# Altium PCB uTCA_MCH_PCB3.pcbdoc (part 1 of 8)
Units mm, origin at the board's own origin, x right, y up, seen from the top; angles counter-clockwise.
Board outline 182.75 x 75.8 mm, 10 copper layers (Top Layer, GND1, MidLayer1, PWR1, Mid-Layer 2, GND2, PWR2, Mid-Layer 3, GND3, Bottom Layer), stack 1.568 mm thick; 778 components, 977 nets, 4756 pads, 1214 vias.
Unrouted connection lines stored in the file: 1790.
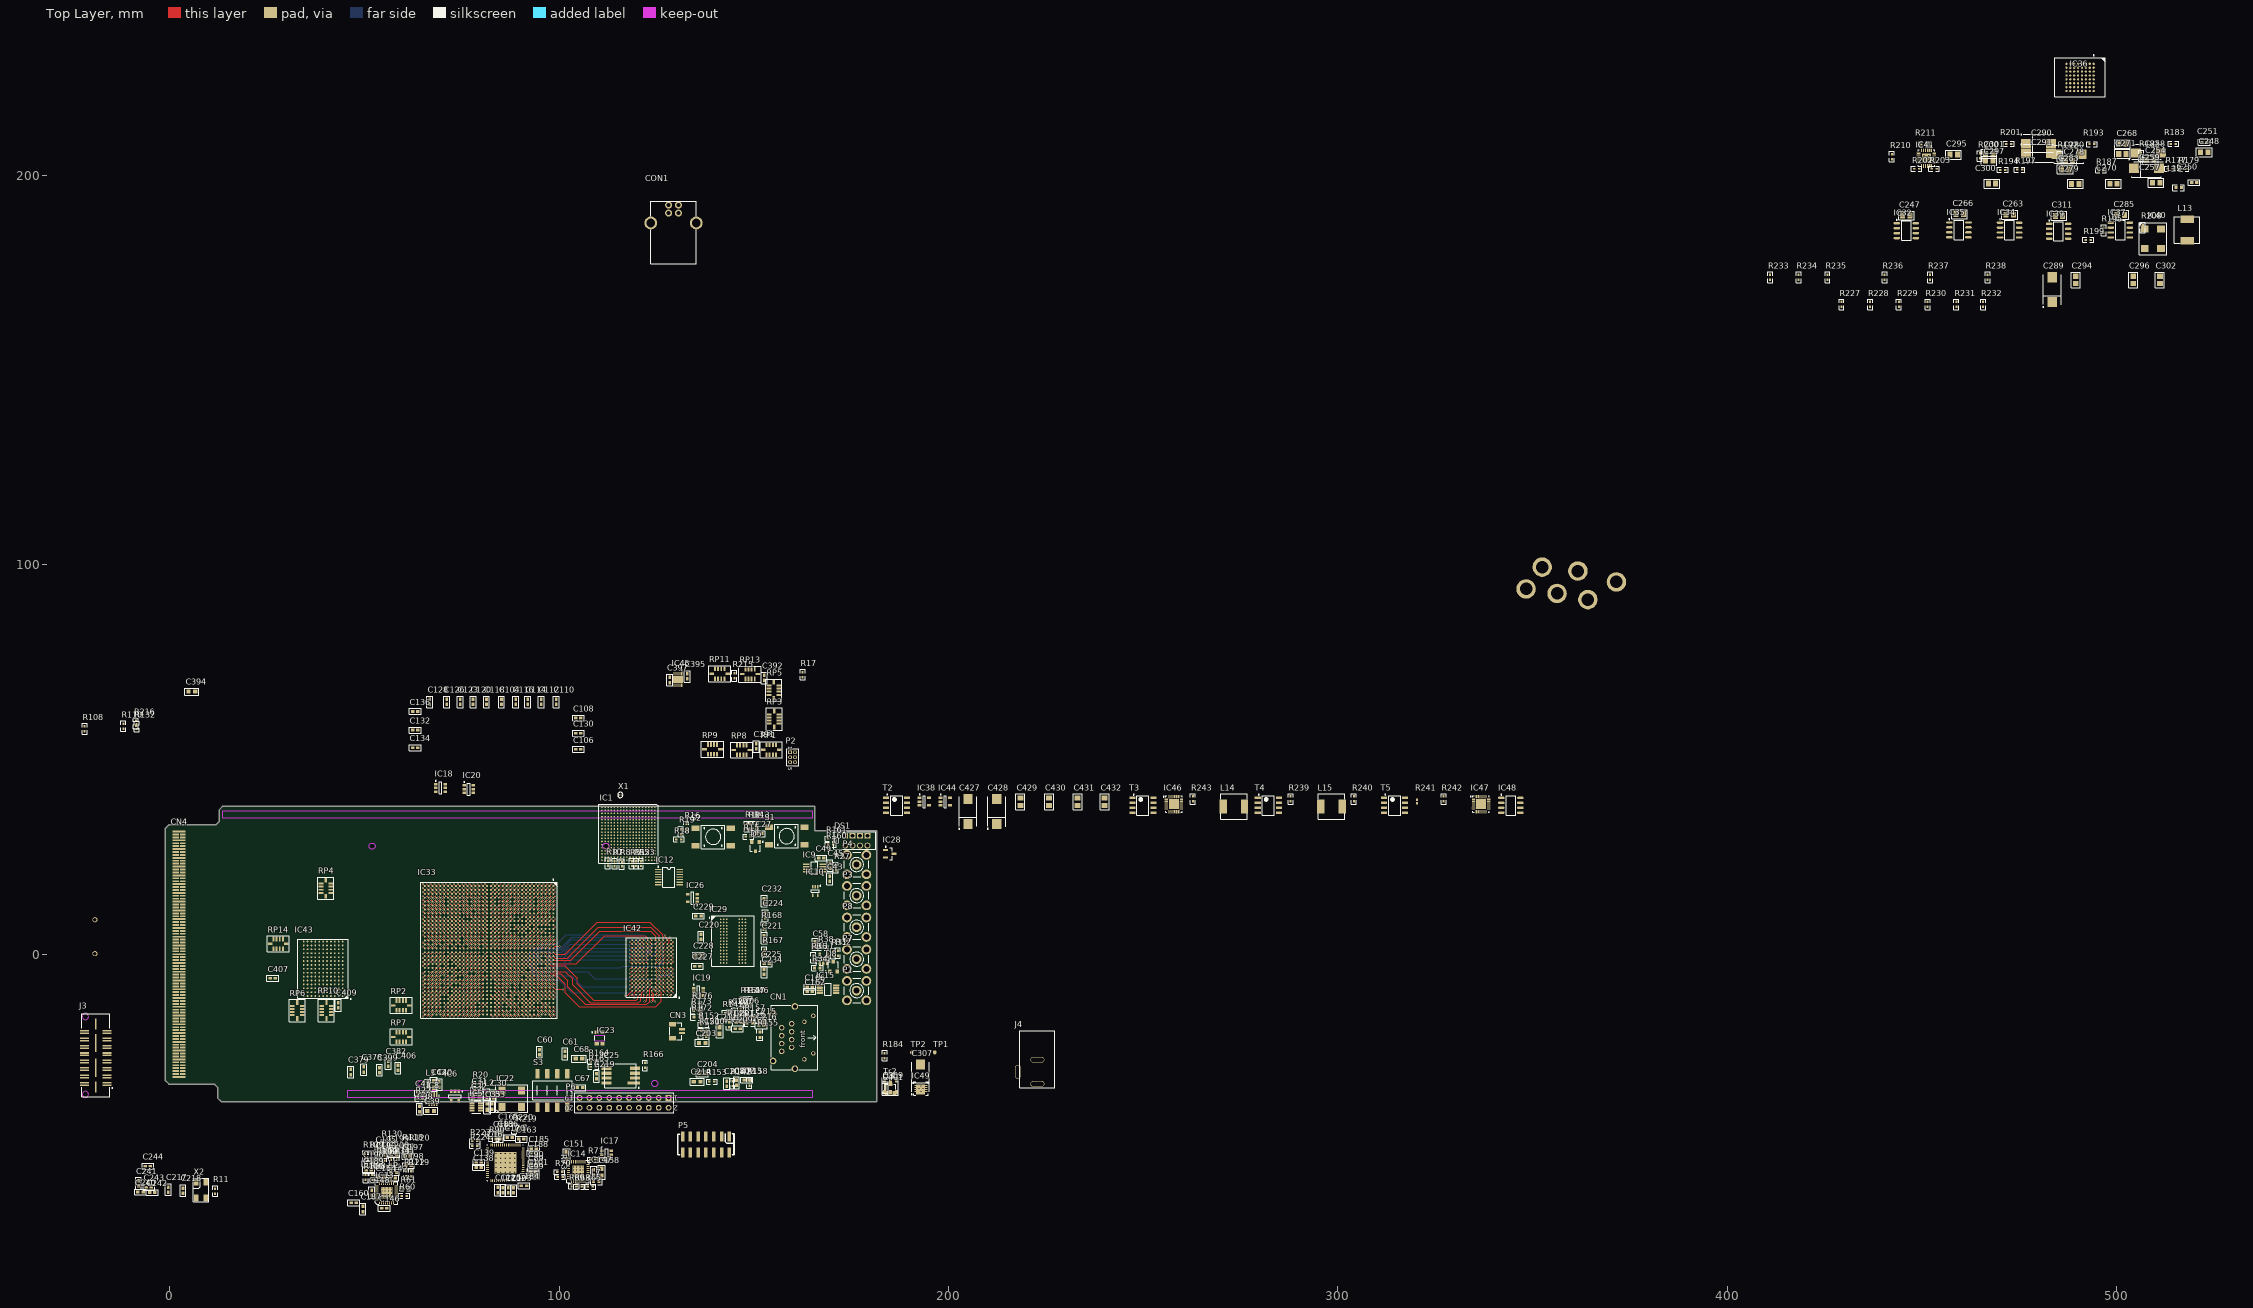
[diagram p0: Top Layer view]
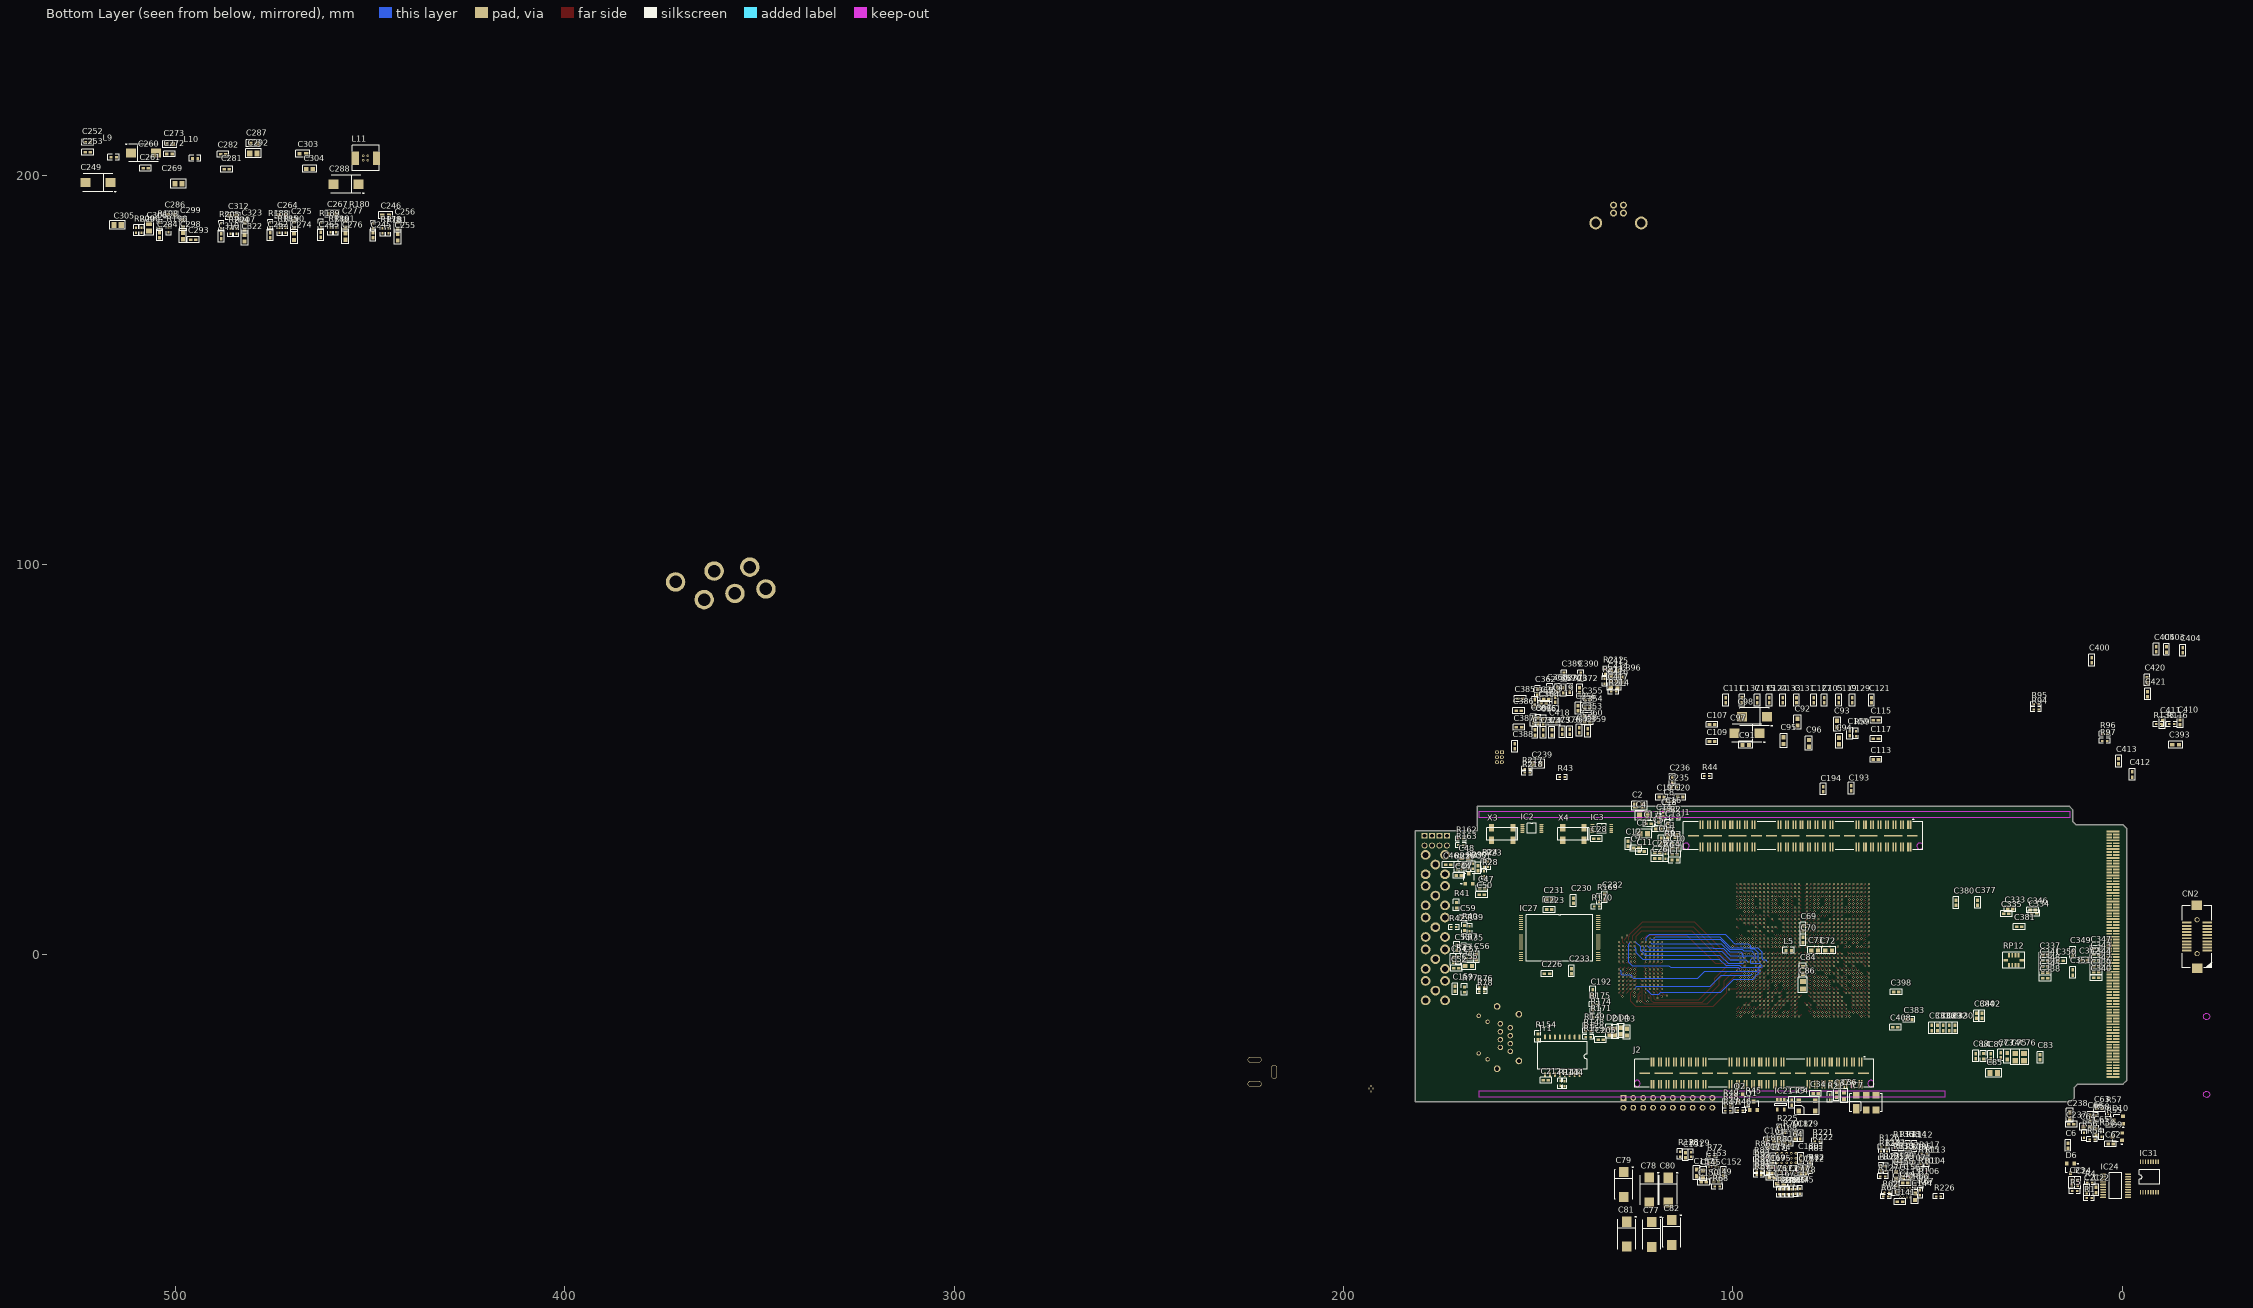
[diagram p1: Bottom Layer view, seen from below]
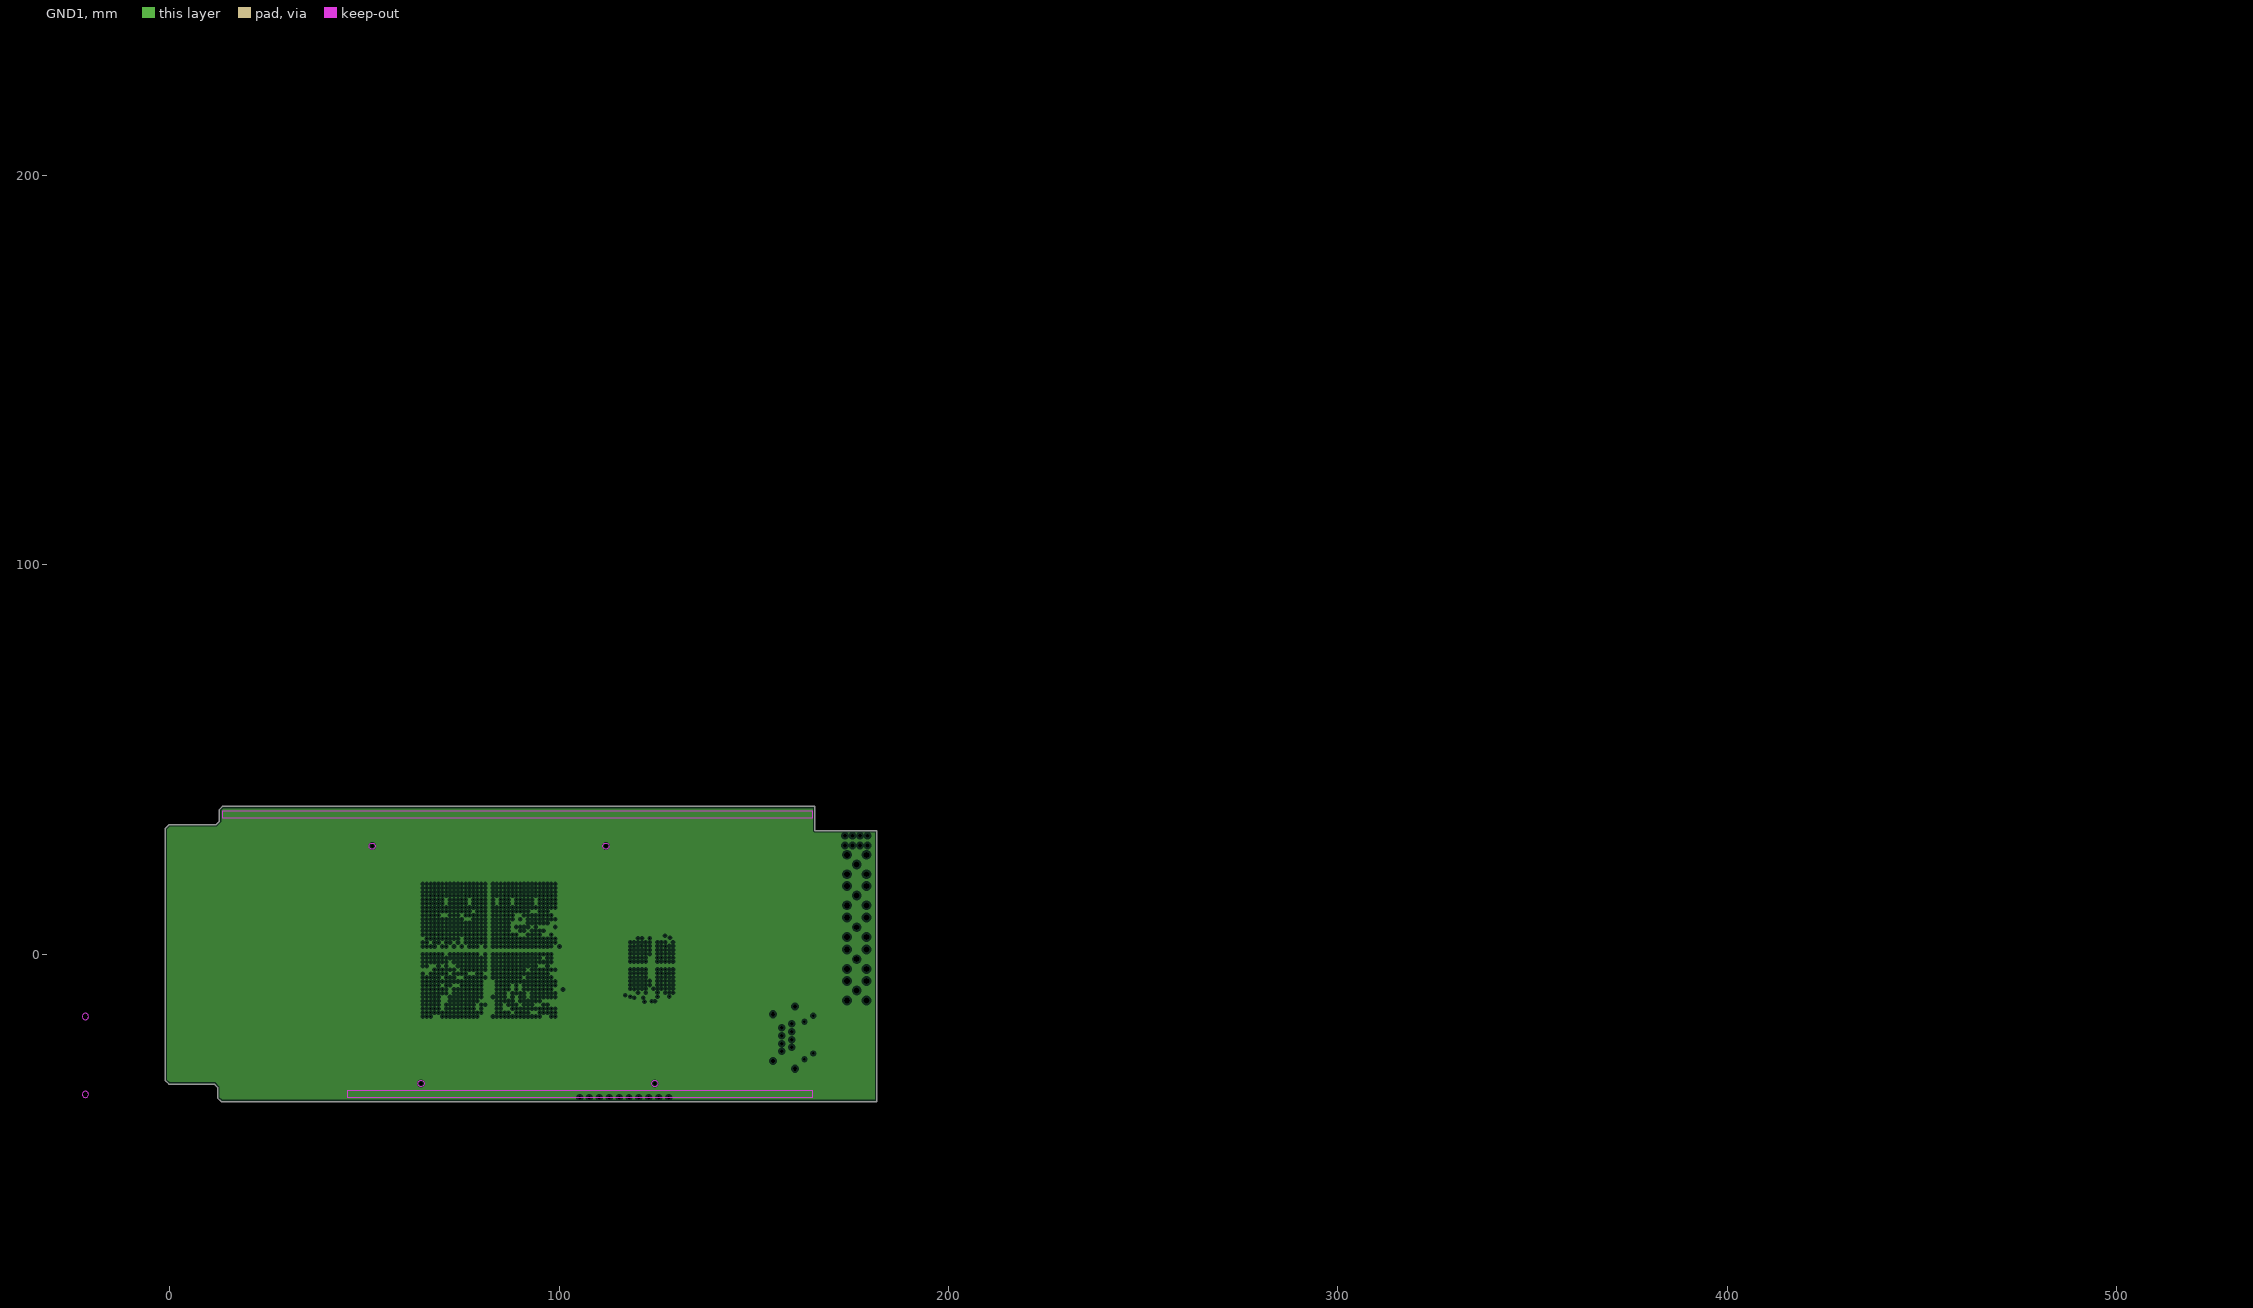
[diagram p2: GND1, clearances drawn from the general rule]
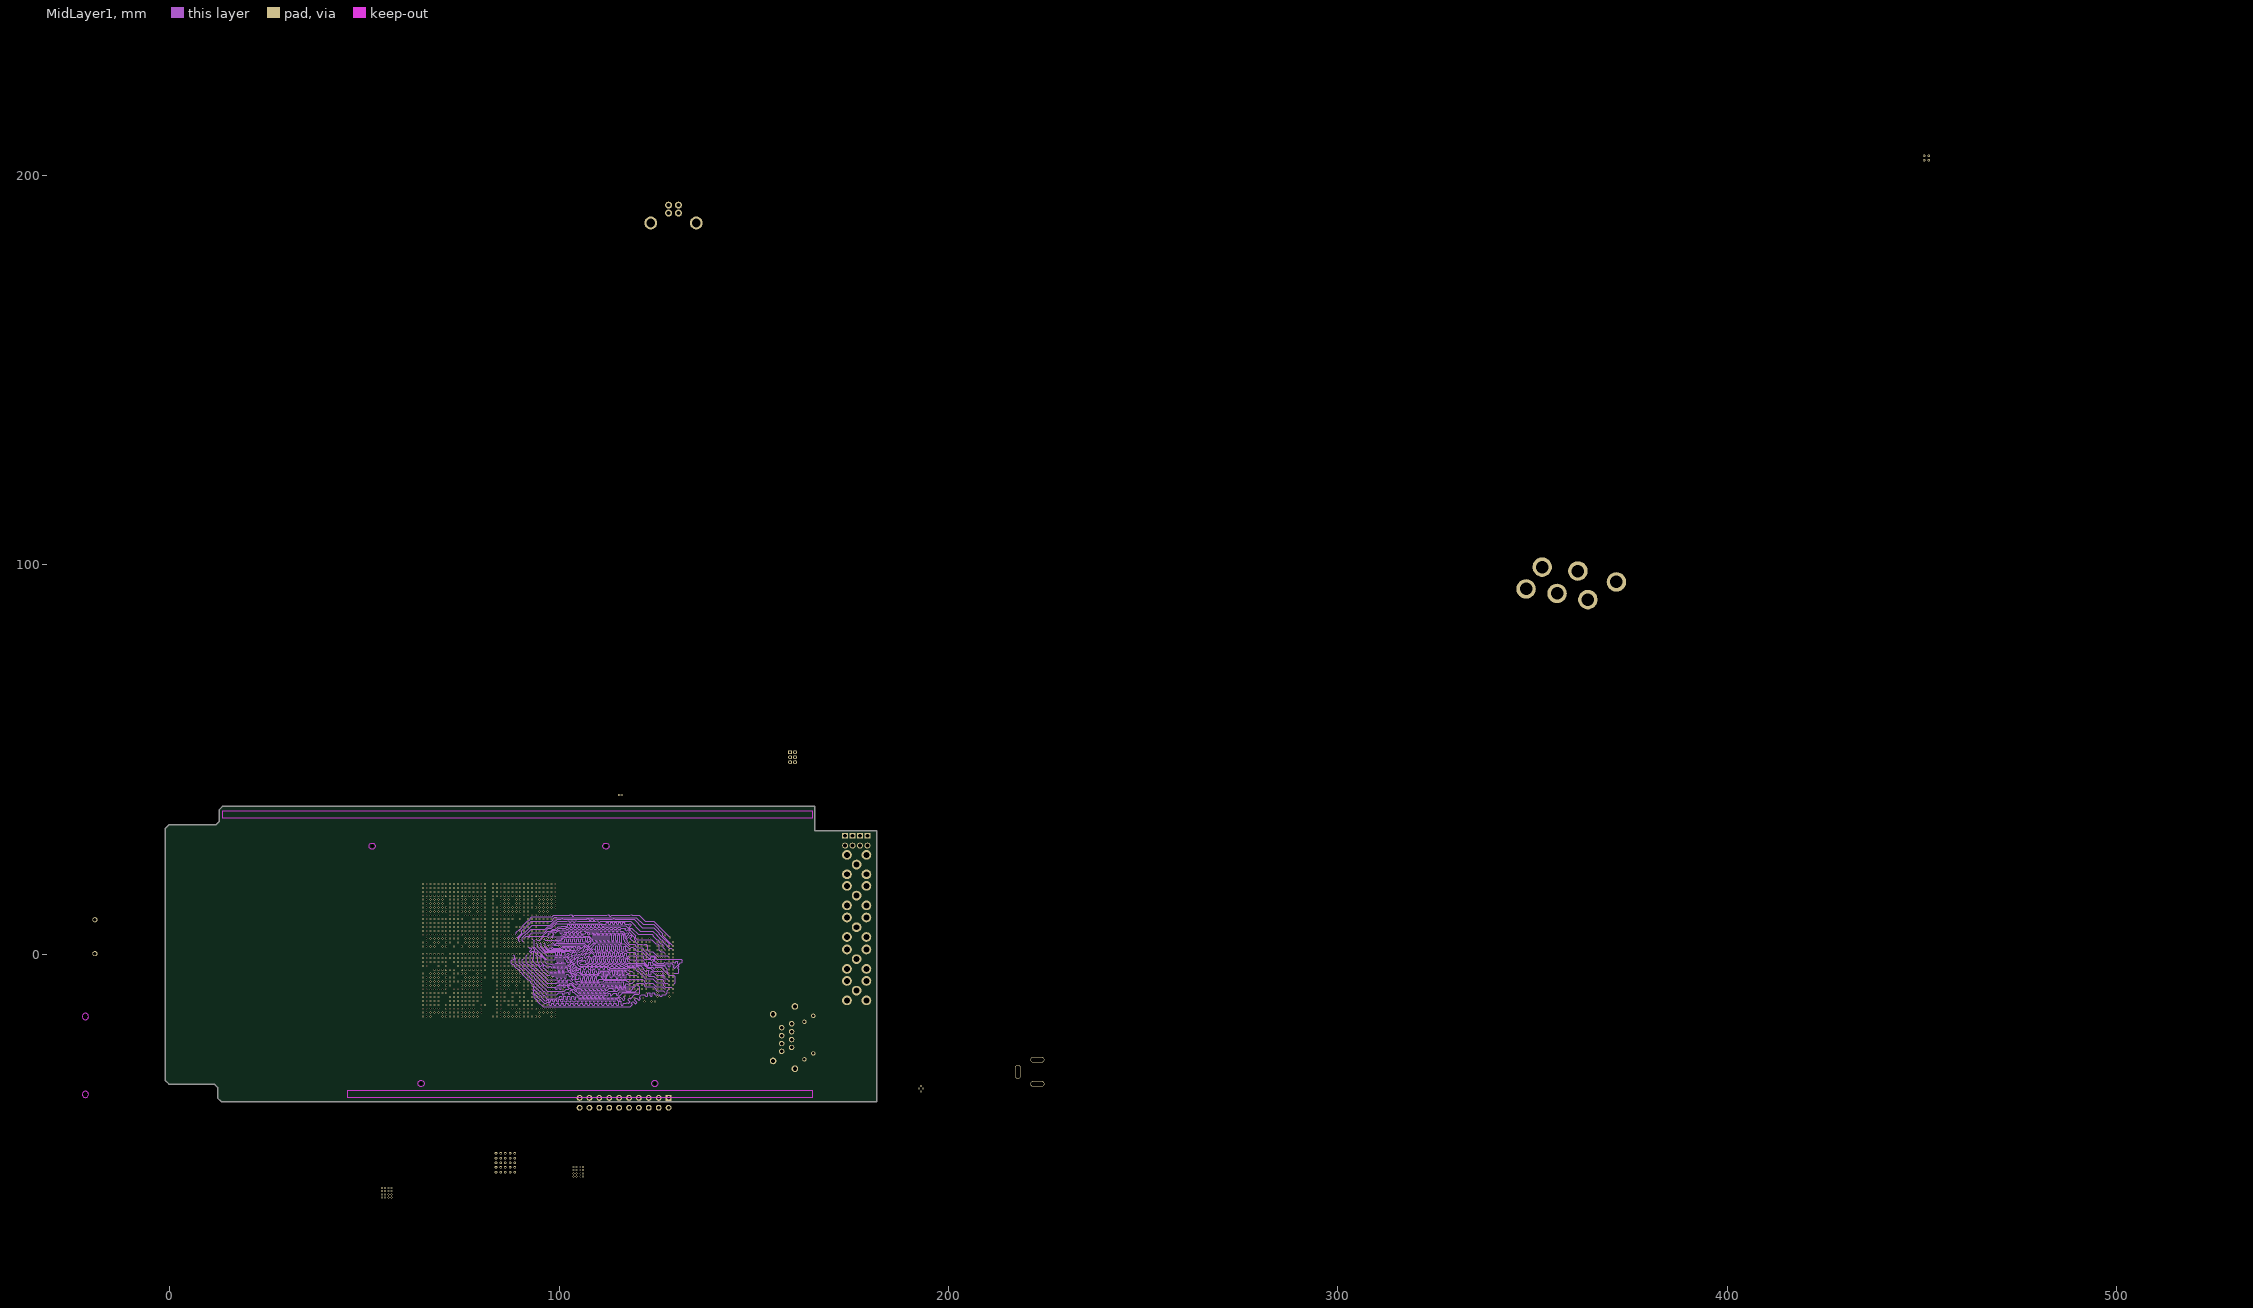
[diagram p3: MidLayer1]
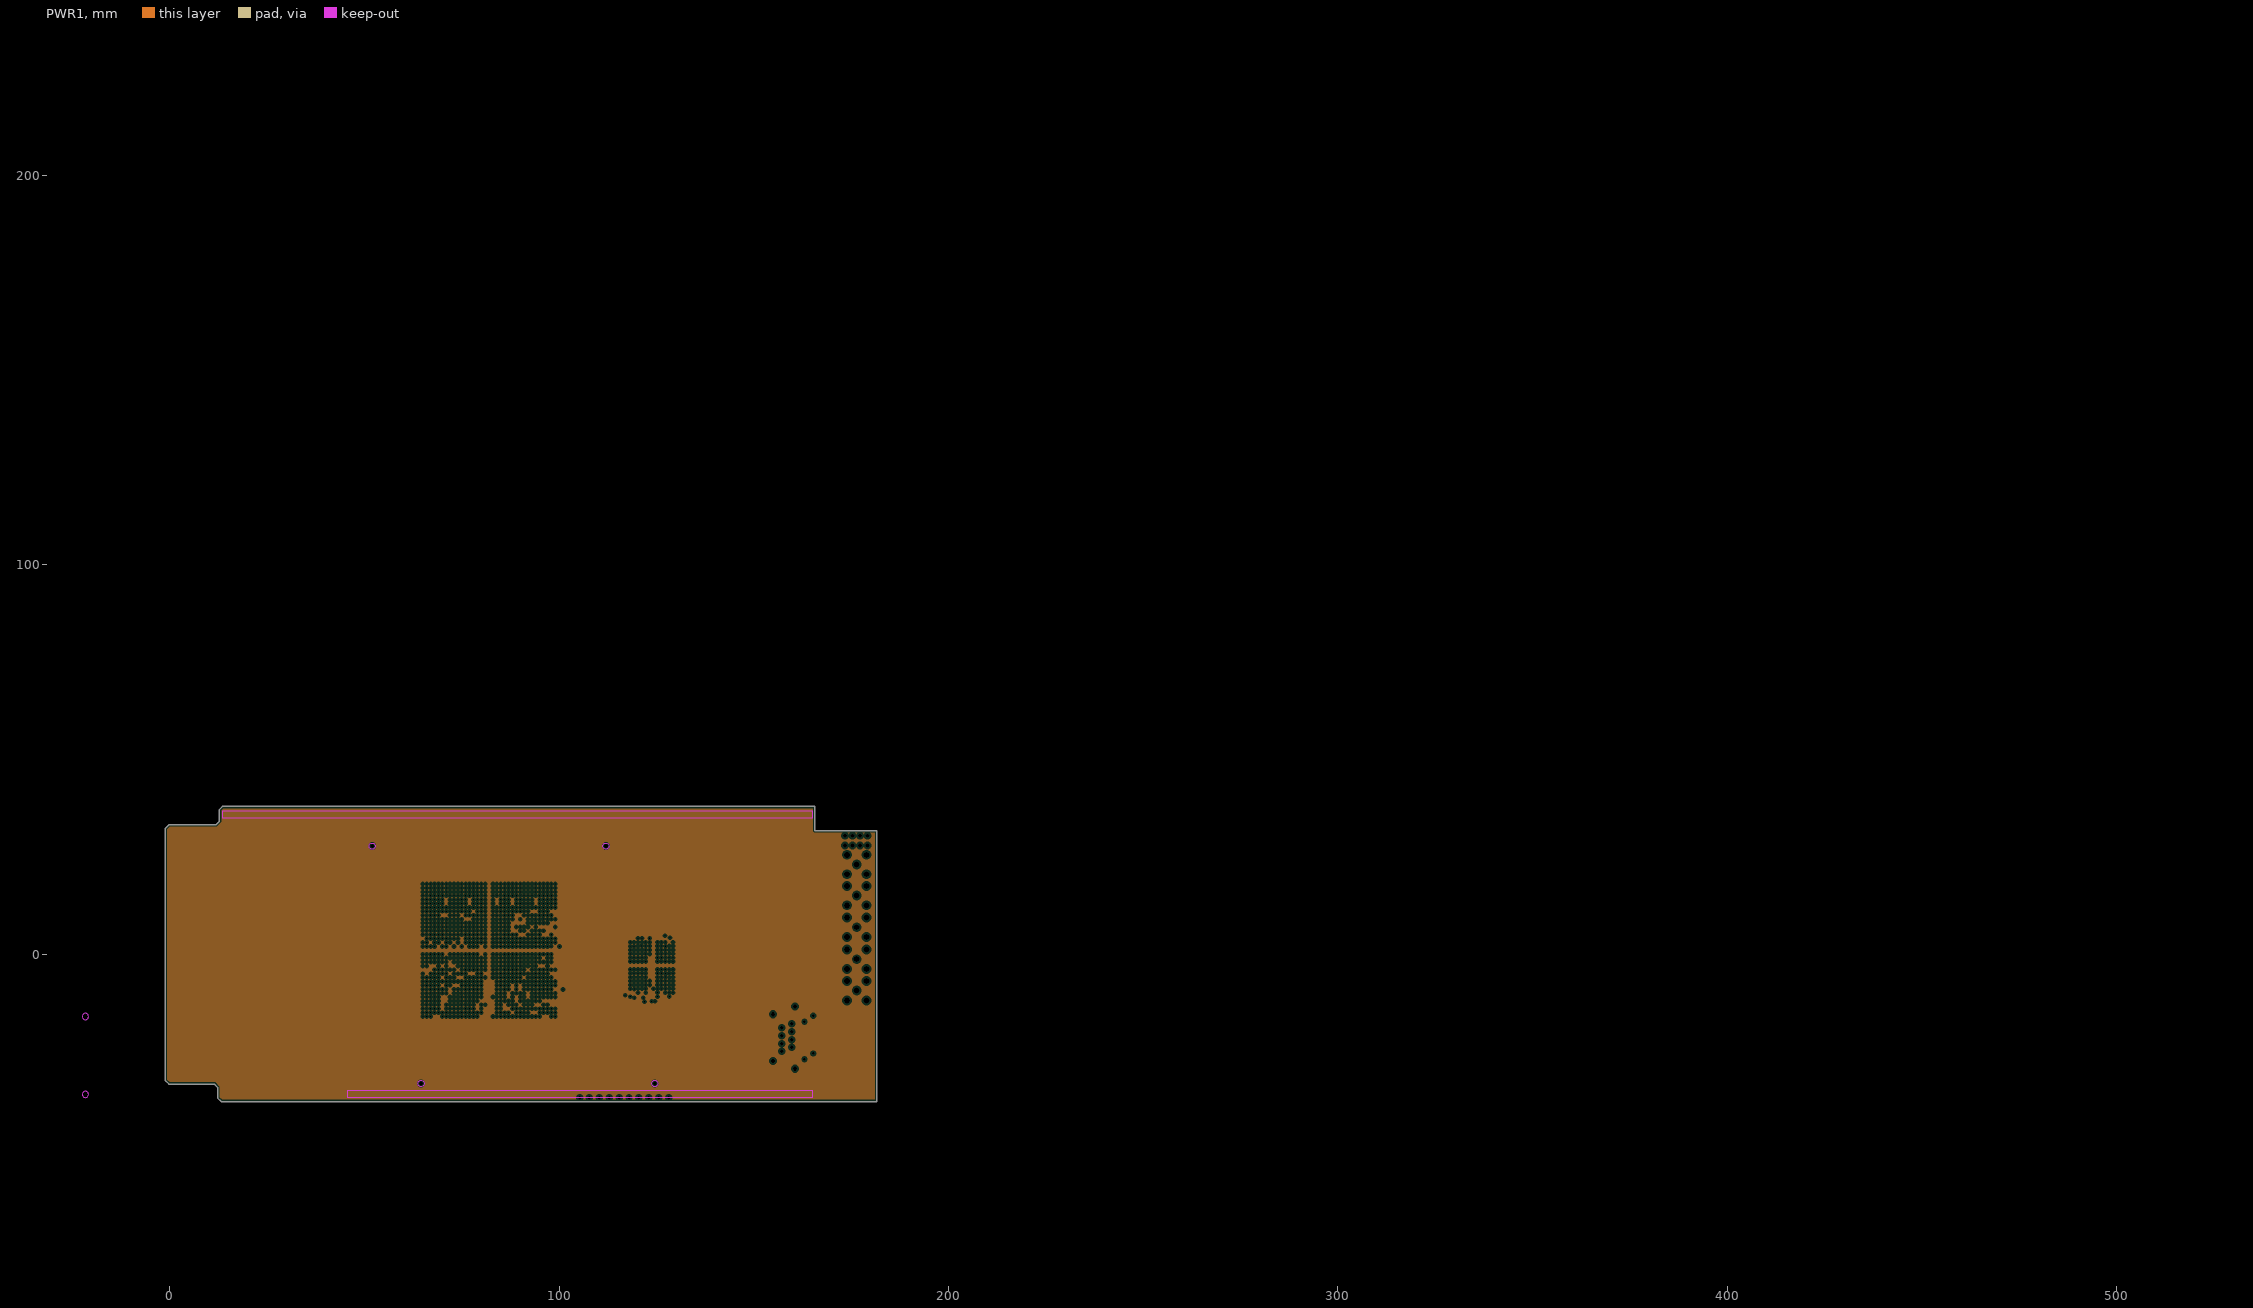
[diagram p4: PWR1, clearances drawn from the general rule]
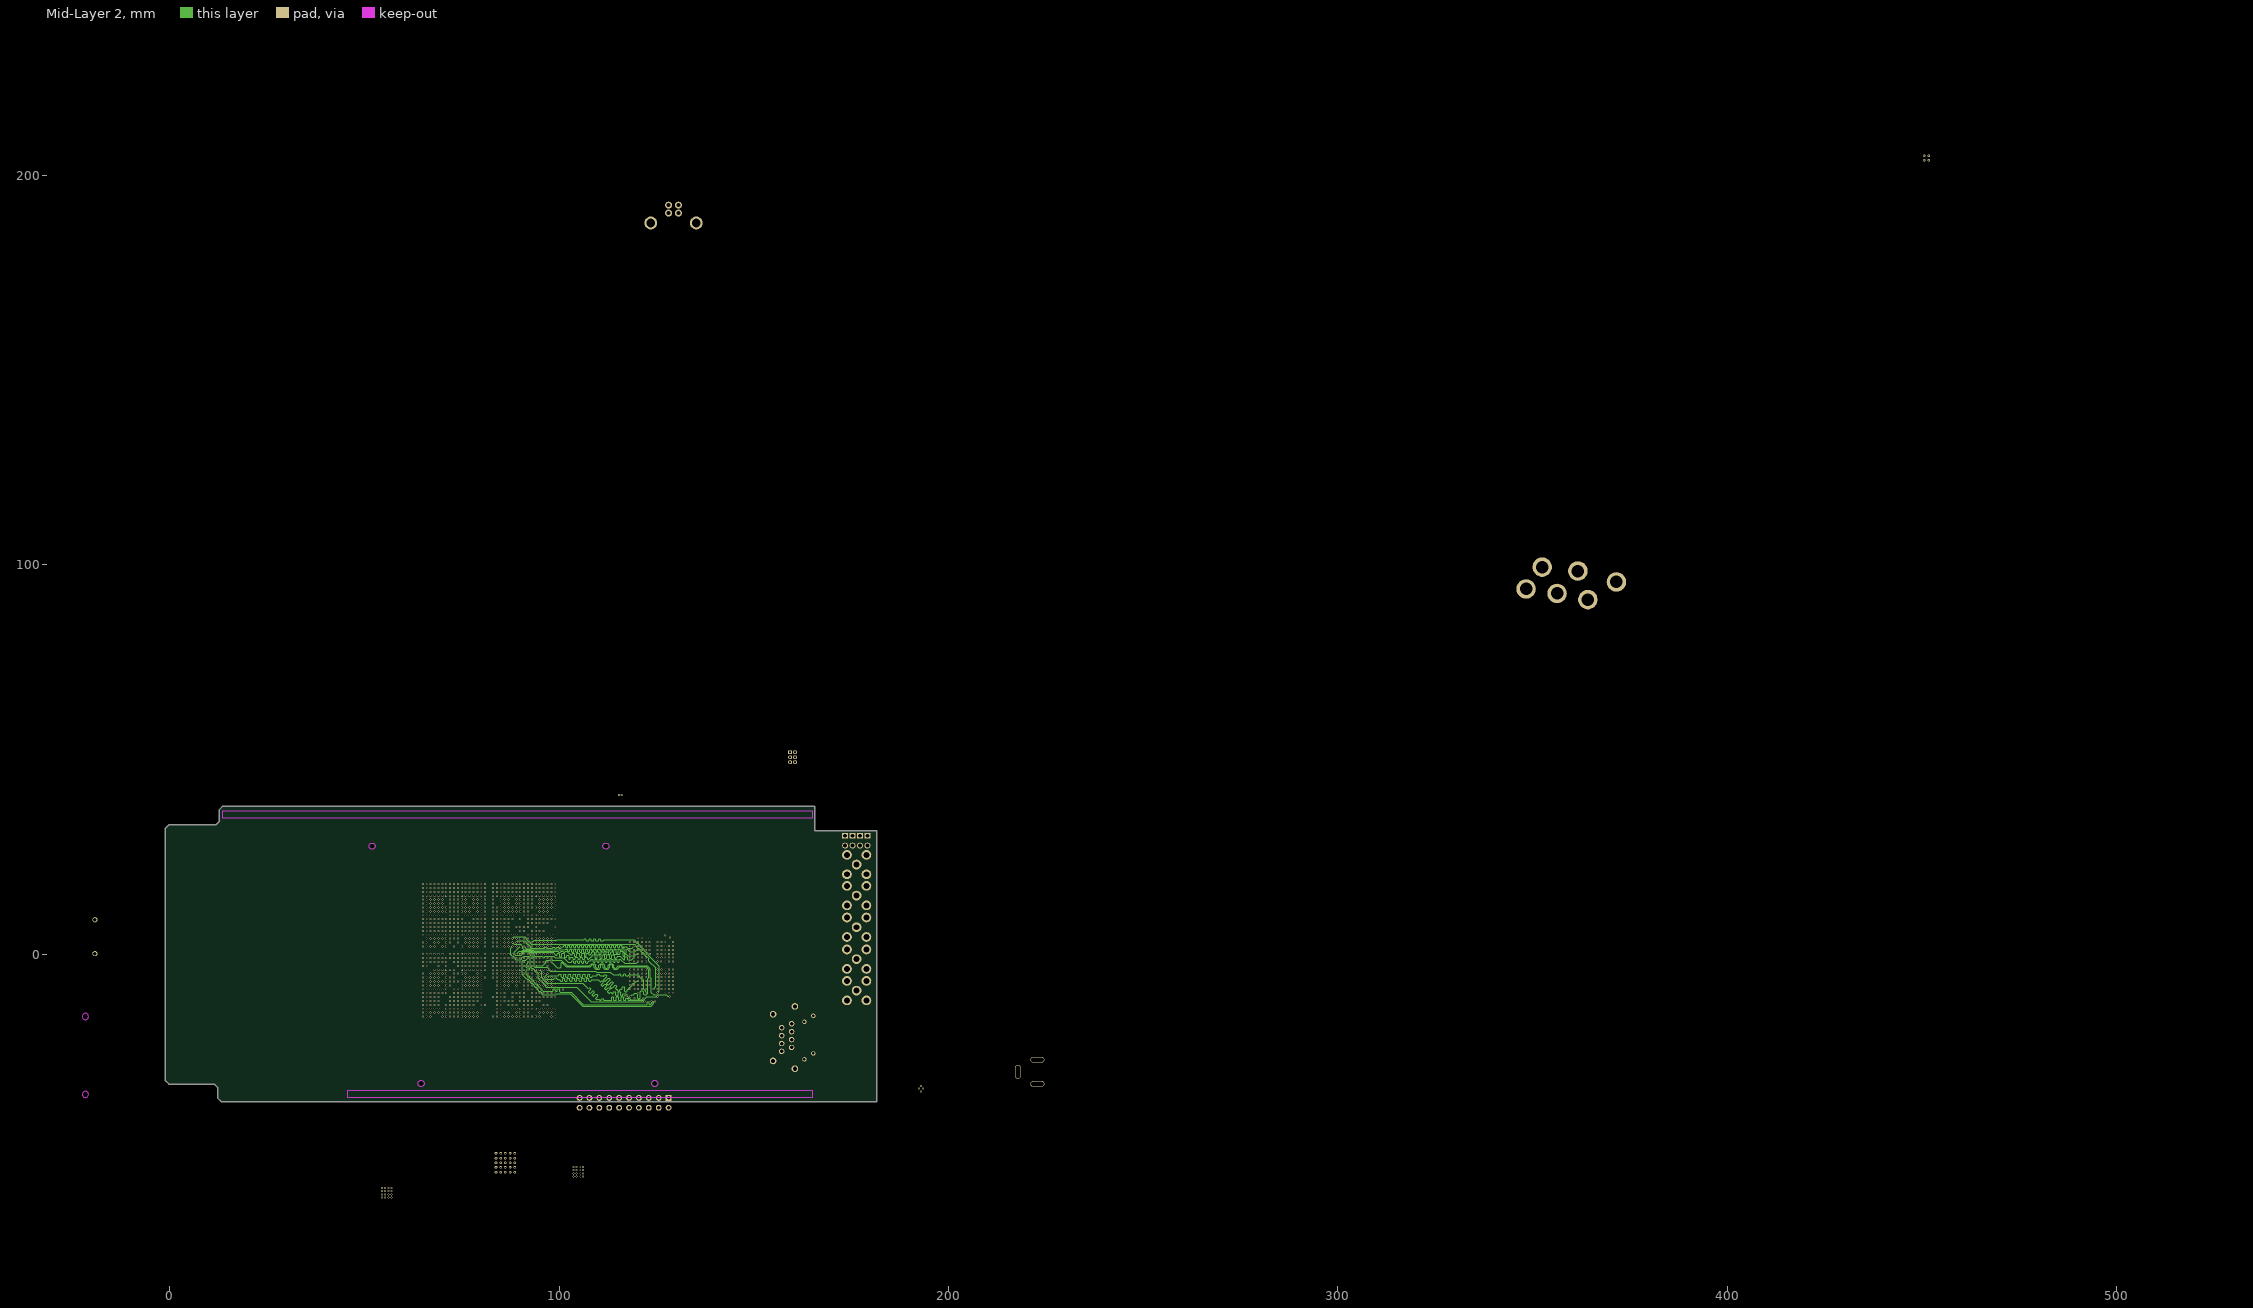
[diagram p5: Mid-Layer 2]
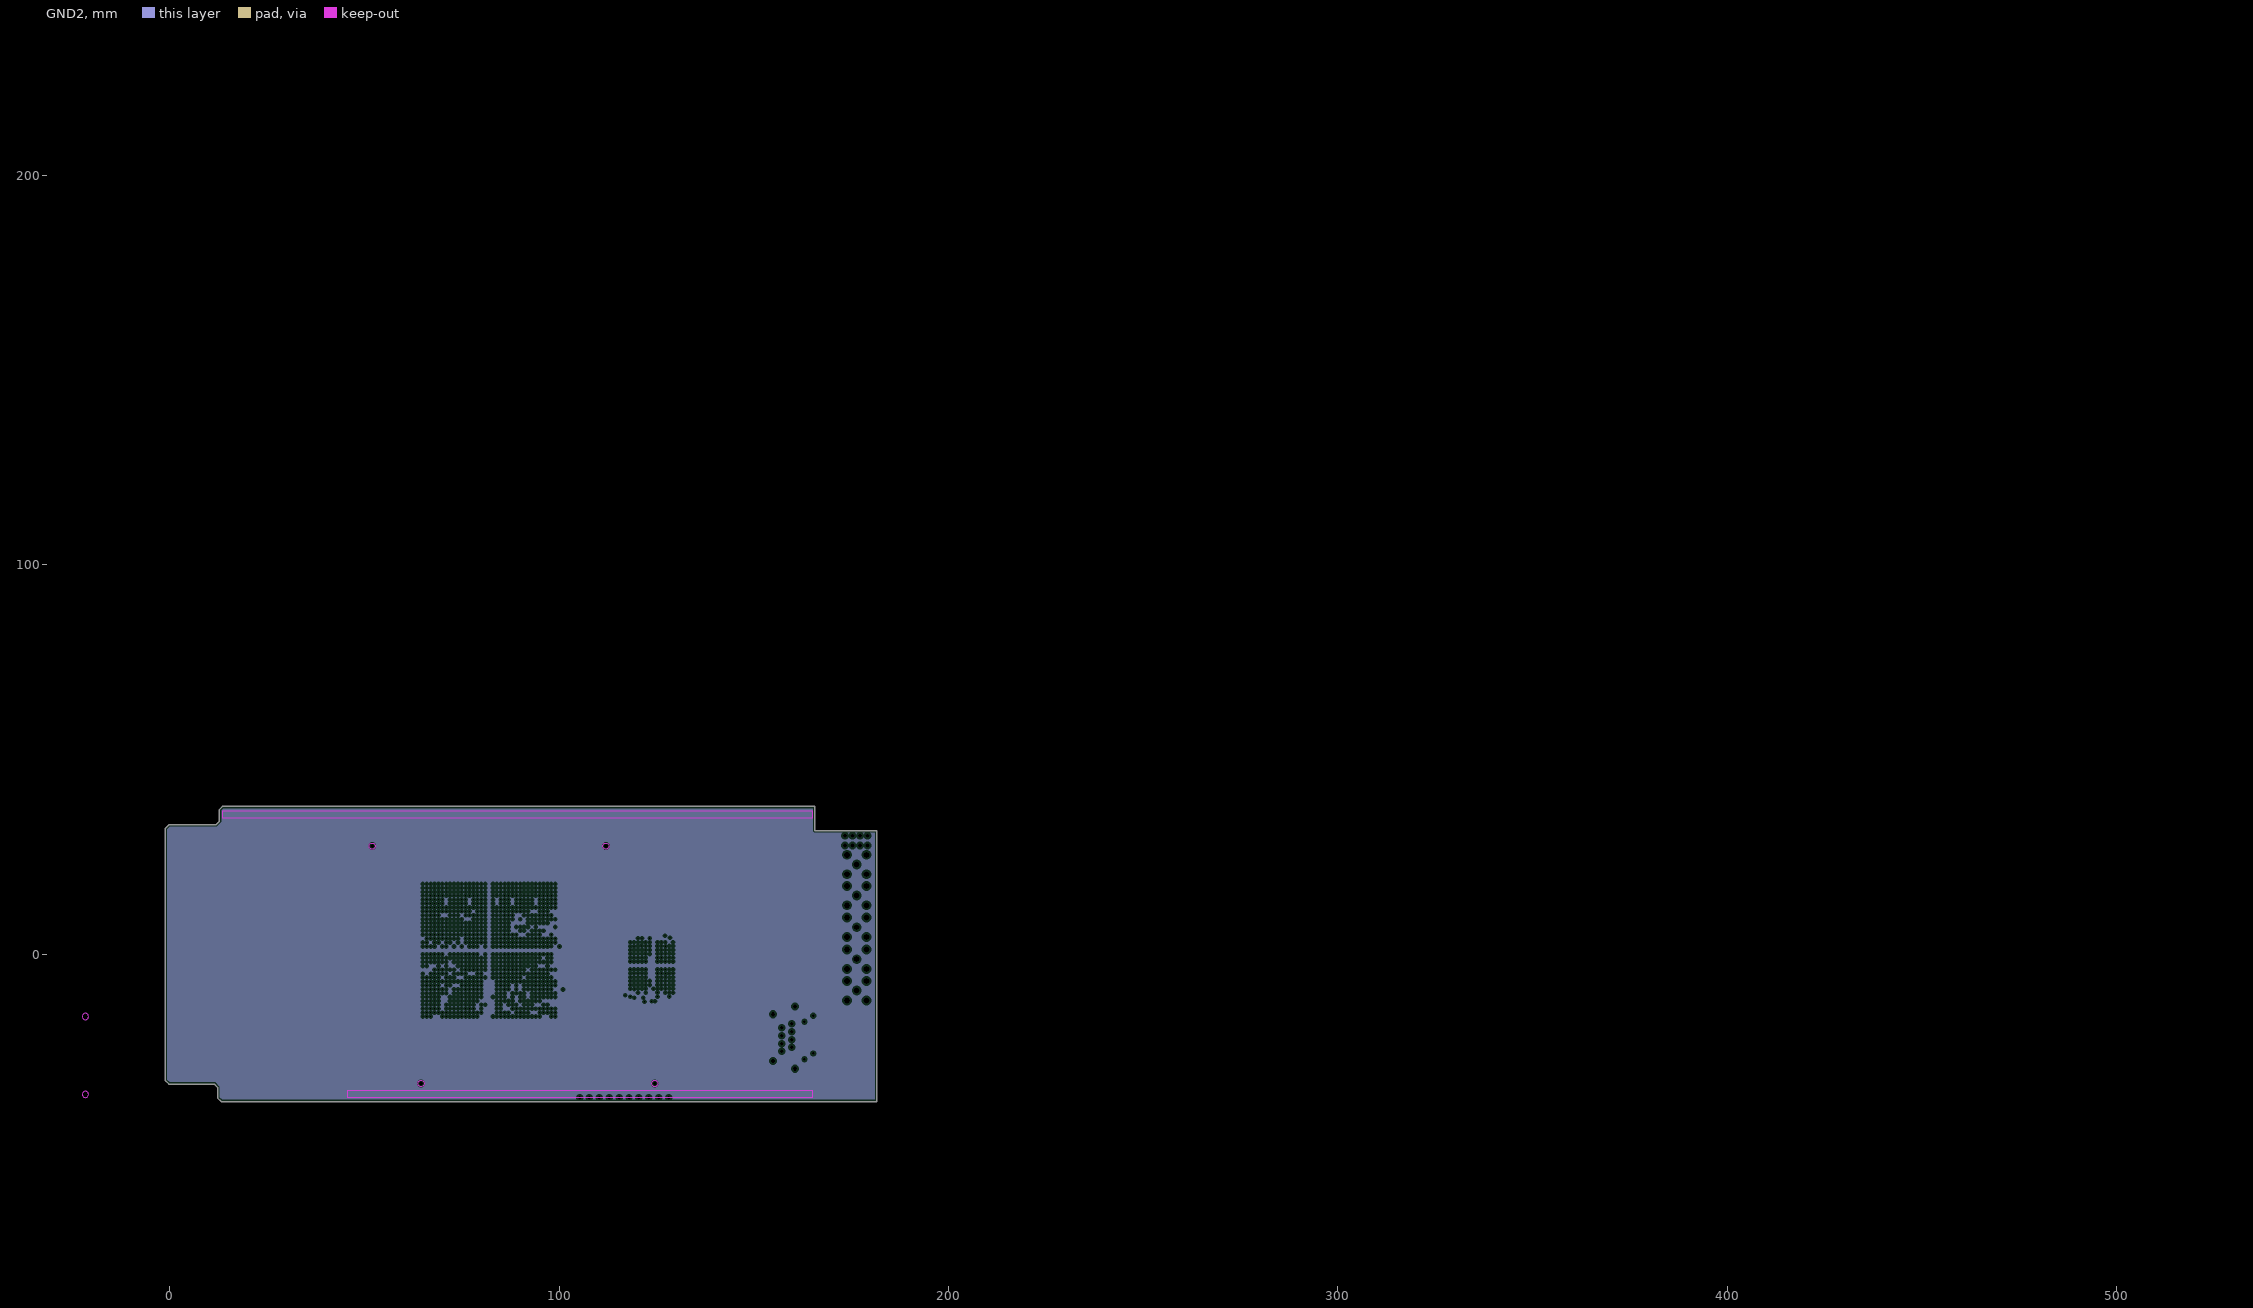
[diagram p6: GND2, clearances drawn from the general rule]
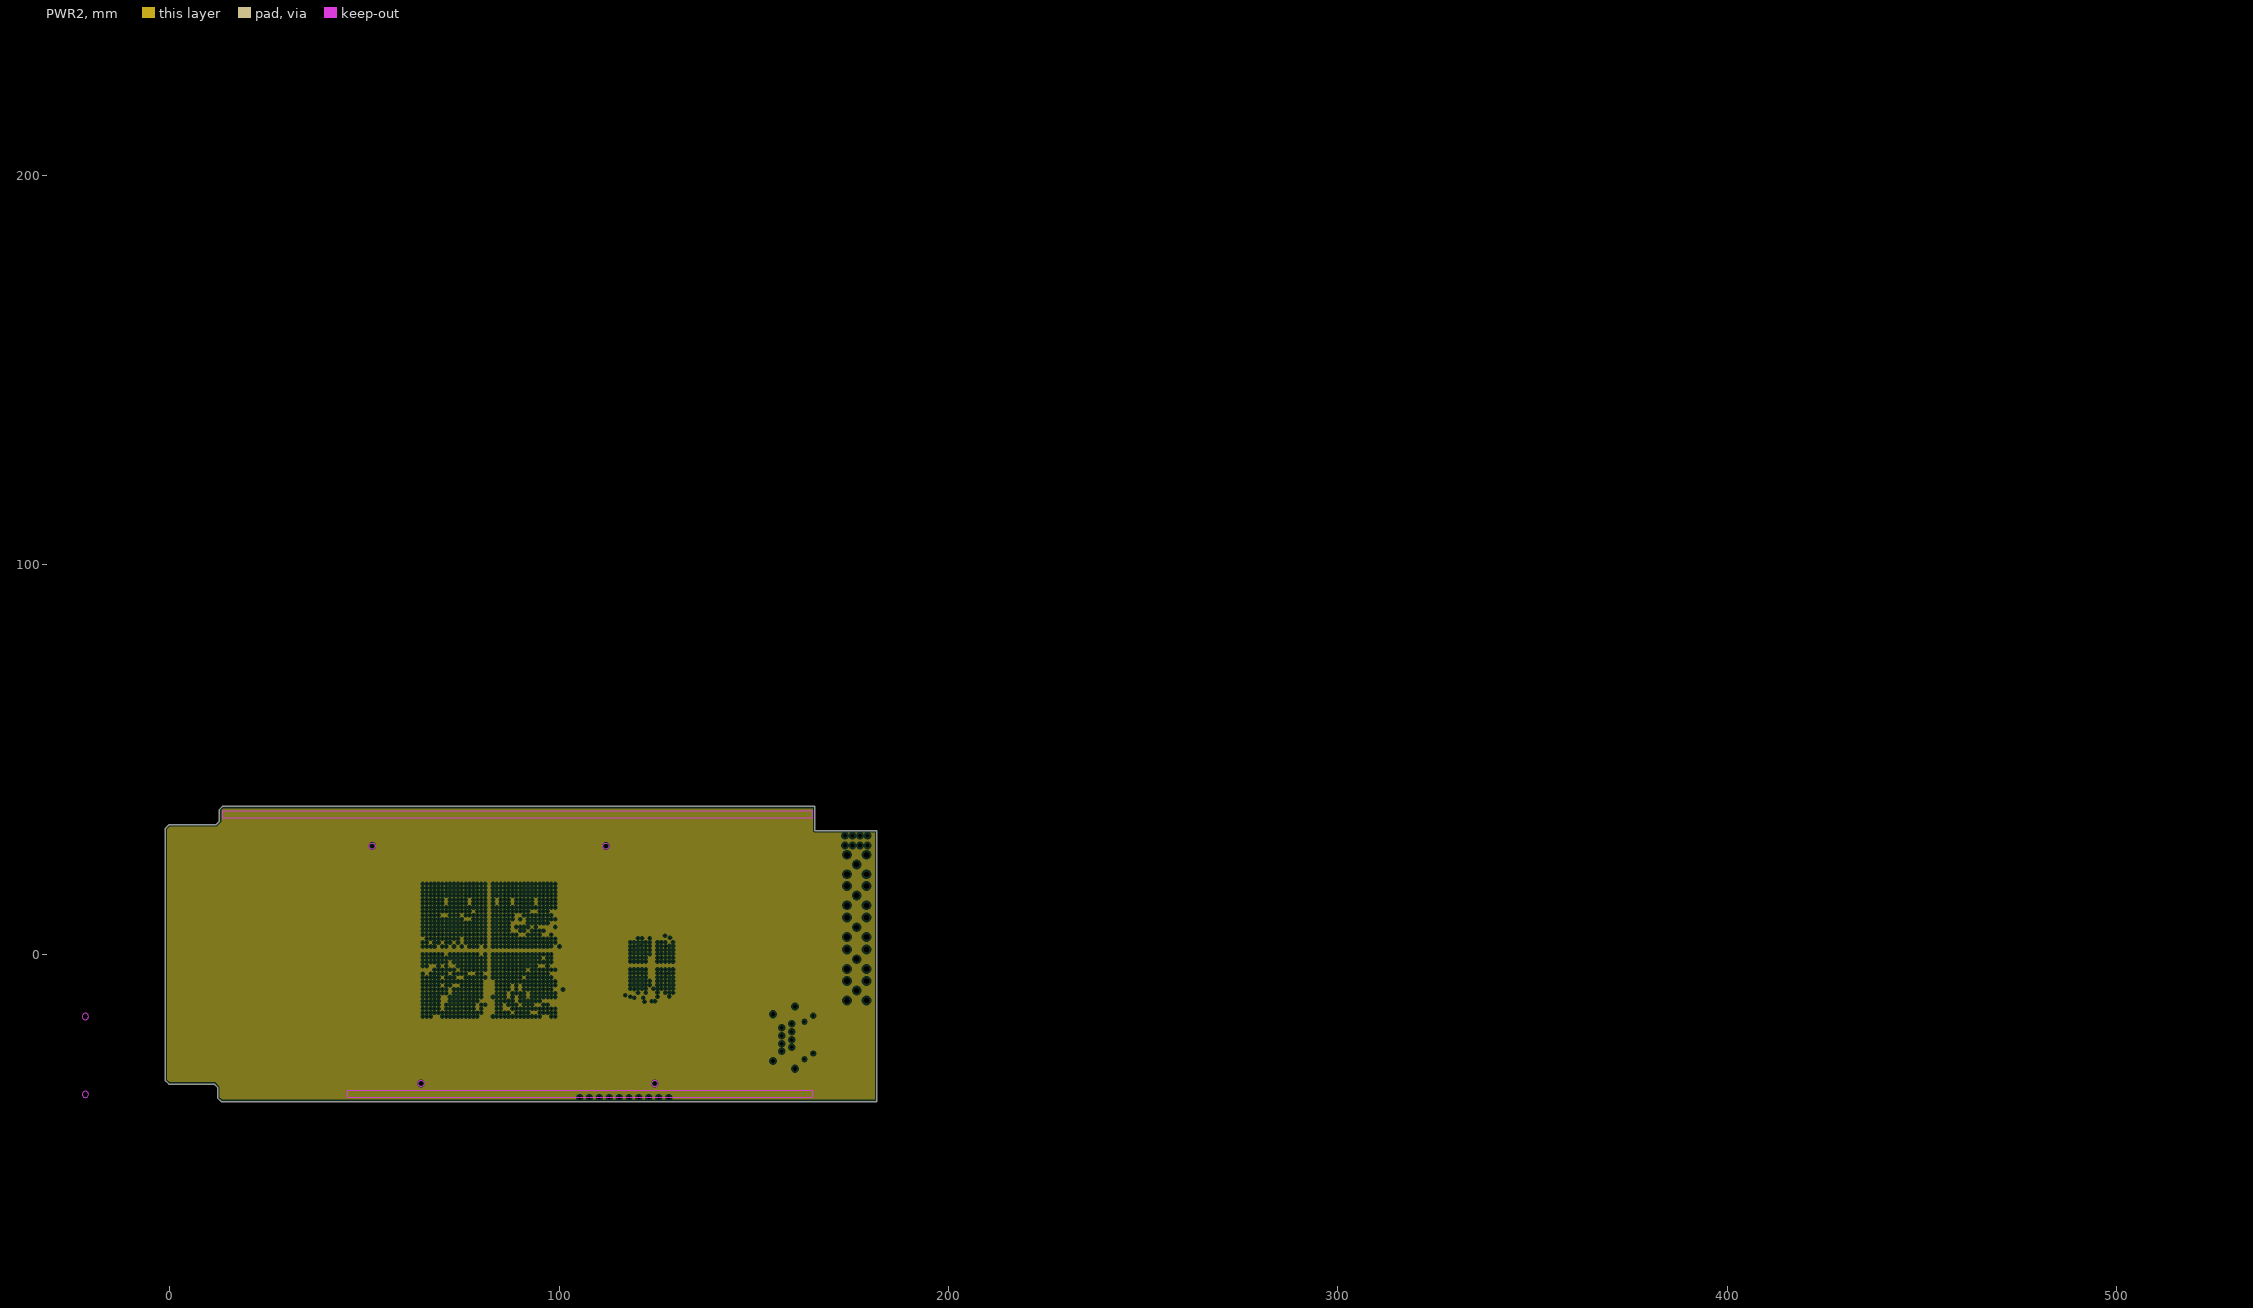
[diagram p7: PWR2, clearances drawn from the general rule]
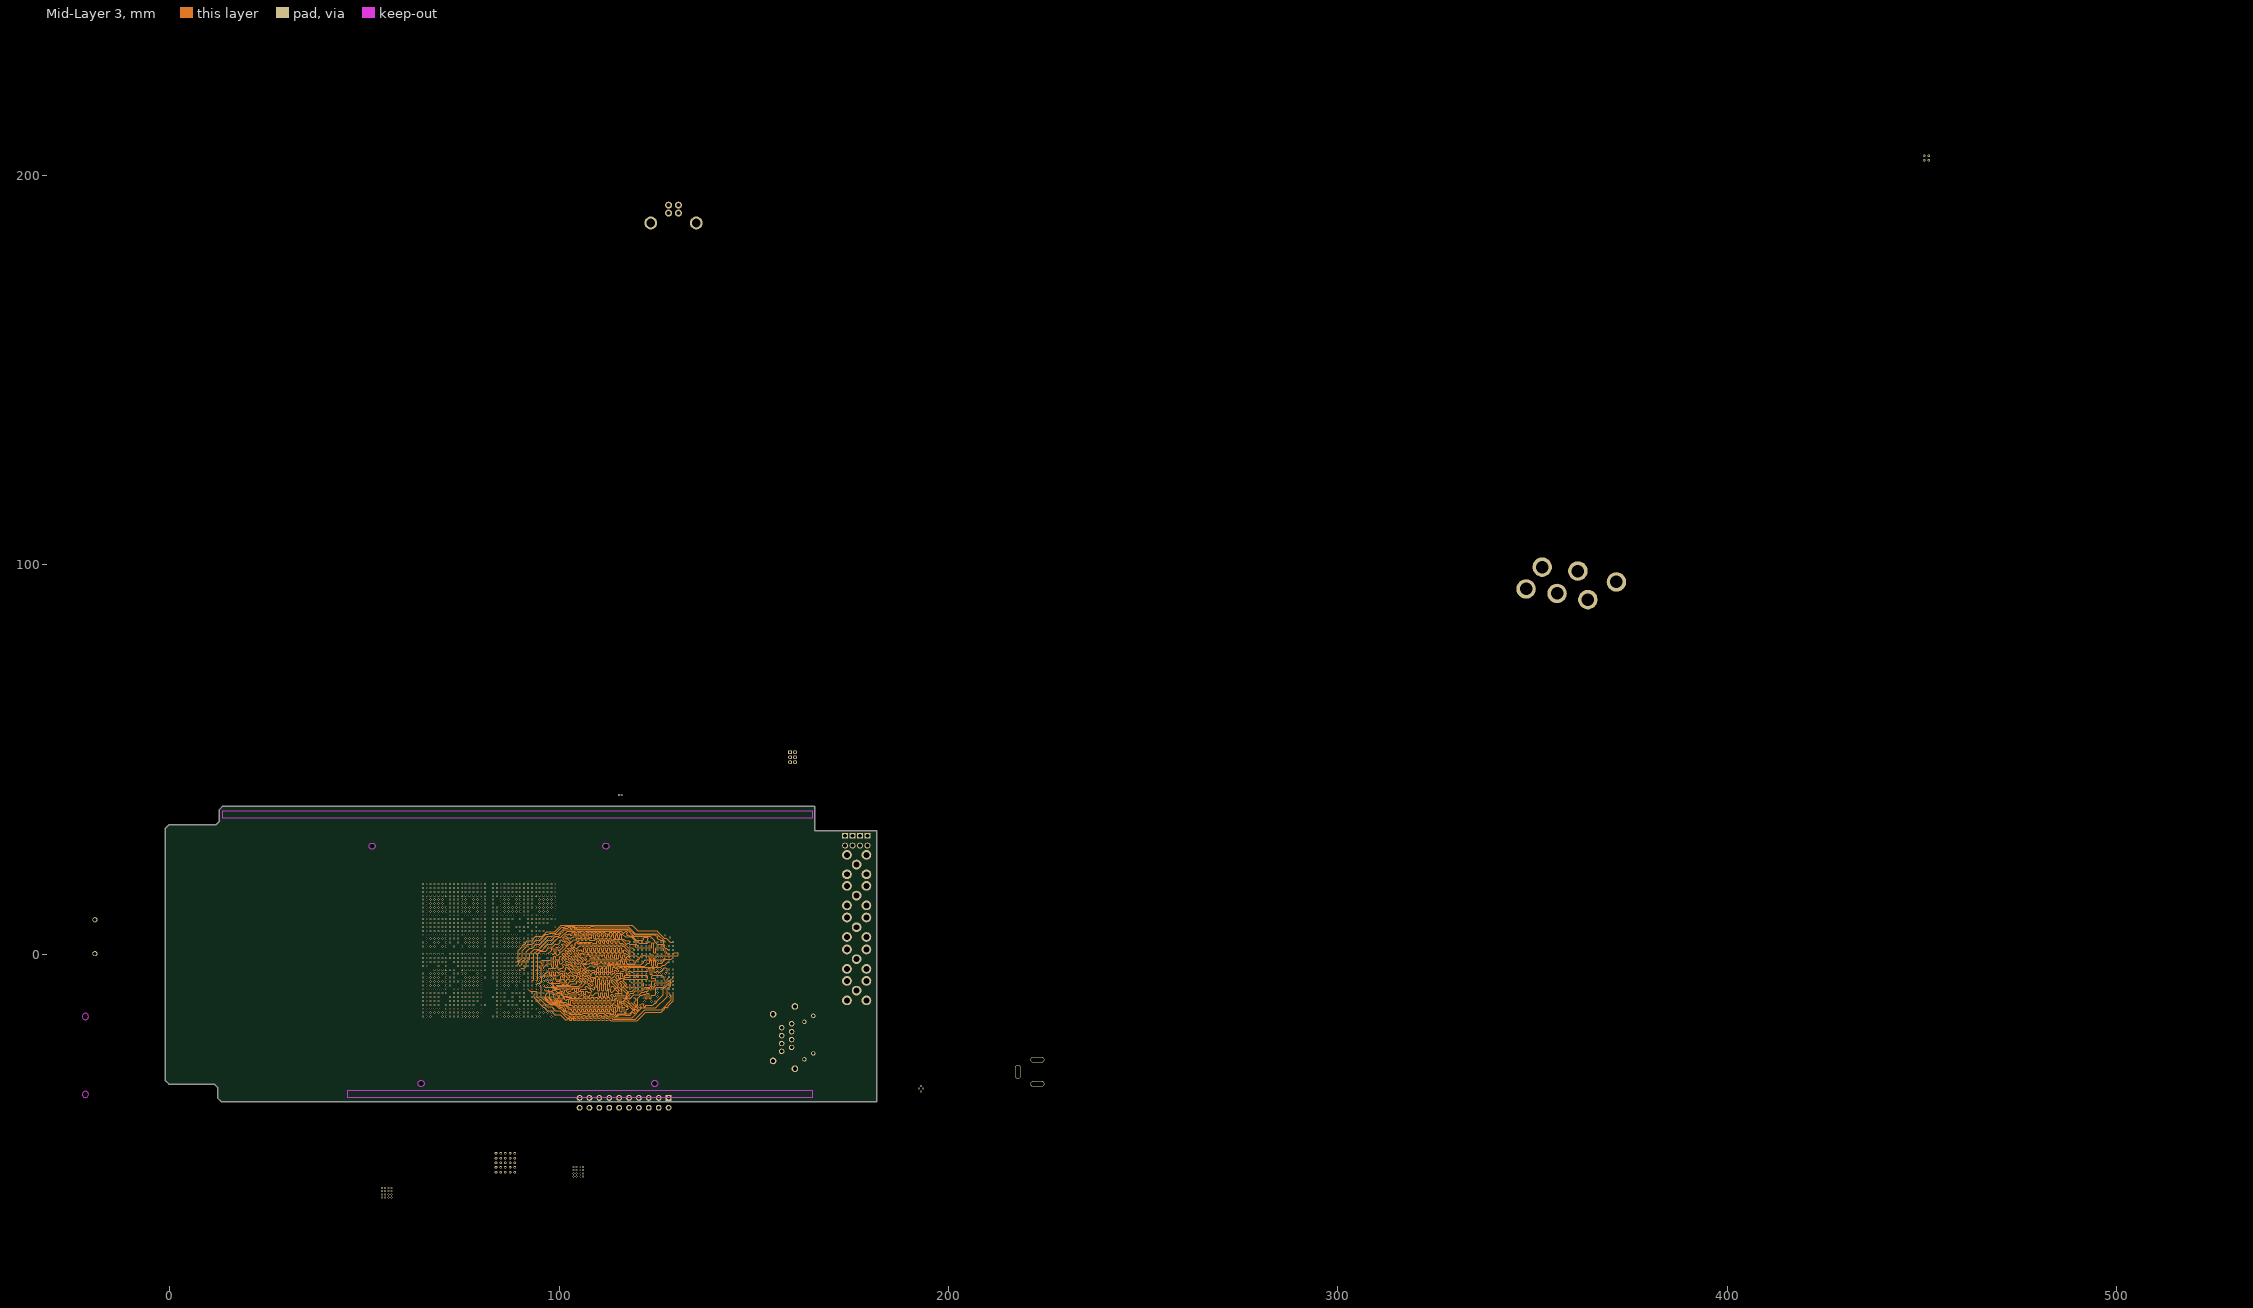
[diagram p8: Mid-Layer 3]
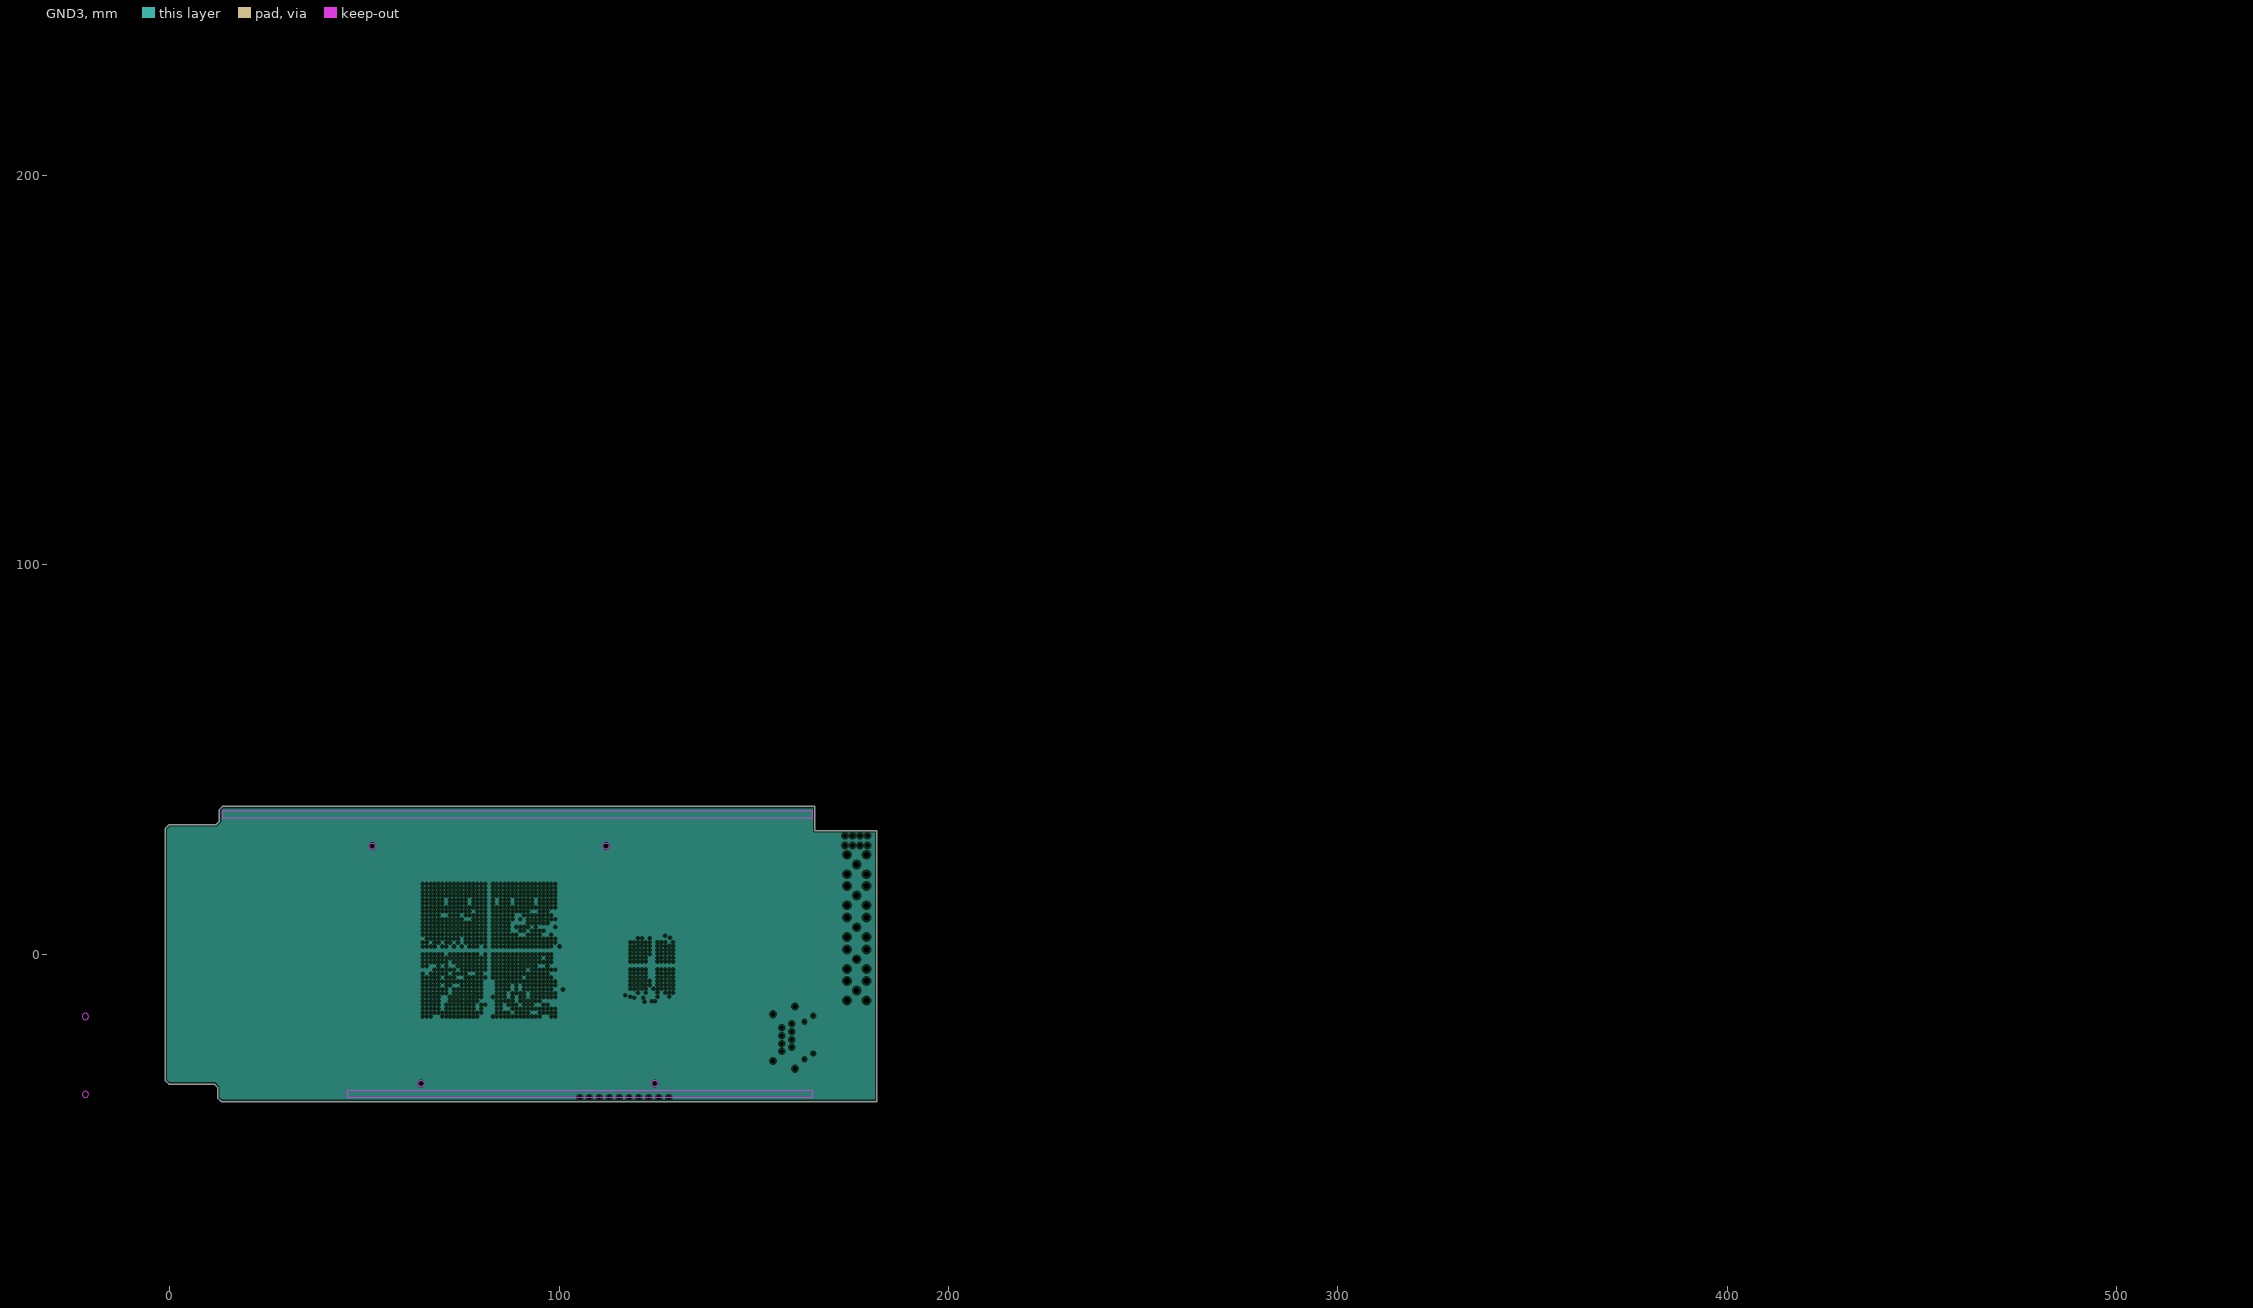
[diagram p9: GND3, clearances drawn from the general rule]

## Layer stack, top to bottom
Top Layer: signal copper 0.042
Dielectric: prepreg 0.11, FR-4, Dk 4.6
GND1: plane copper 0.017
Dielectric: core 0.15, FR-4, Dk 4.5
MidLayer1: signal copper 0.017
Dielectric: prepreg 0.176, FR-4, Dk 4.7
PWR1: plane copper 0.017
Dielectric: core 0.15, FR-4, Dk 4.5
Mid-Layer 2: signal copper 0.017
Dielectric: prepreg 0.176, FR-4, Dk 4.7
GND2: plane copper 0.017
Dielectric: core 0.15, FR-4, Dk 4.5
PWR2: plane copper 0.017
Dielectric: prepreg 0.176, FR-4, Dk 4.7
Mid-Layer 3: signal copper 0.017
Dielectric: core 0.15, FR-4, Dk 4.5
GND3: plane copper 0.017
Dielectric: prepreg 0.11, FR-4, Dk 4.6
Bottom Layer: signal copper 0.042

## Board outline
-1.15,32.3 -0.2,33.25 11.85,33.25 12.75,34.15 12.75,37.15 13.55,37.95 165.7,37.95 165.7,31.7 181.6,31.7 181.6,-37.85 13.25,-37.85 12.3,-36.9 12.3,-34.2 11.45,-33.35 -0.2,-33.35 -1.15,-32.4

## Design rules (kind name [scope] priority, off if disabled: settings)
Clearance Clearance_Clocks_QDR [InDifferentialPairClass('clocks_QDR')] p1: gap=0.15
Clearance [All] p2: gap=0.125
DiffPairsRouting [(InDifferentialPairClass('All Differential Pairs') and Not IsVia)] p1: maxlimit=0.261 minlimit=0.153 mostfreqgap=0.261 toplayer_maxgap=0.153 toplayer_prefgap=0.153 midlayer1_mingap=0.261 midlayer2_mingap=0.261 midlayer3_mingap=0.261 bottomlayer_maxgap=0.153 bottomlayer_prefgap=0.153 maxuncoupledlength=5
FabricationTestPointUsage TestPointUsage [All] p1: valid=0 allowmultiple=FALSE
FabricationTestpoint Testpoint [All] p1: side=3 testpointundercomponent=TRUE minsize=1.016 maxsize=2.54 preferedsize=1.524 minholesize=0 maxholesize=1.016 preferedholesize=0.813 testpointgrid=0.025 allowsidetop=TRUE allowsidebottom=TRUE usegrid=TRUE gridtolerance=0
HoleSize [All] p1: absolutevalues=TRUE maxlimit=3 minlimit=0.025 maxpercent=80.000 minpercent=20.000
Length Length_QDR1_Q [InNetClass('Q2_Q[35..0]')] p1: maxlimit=48.522 minlimit=48.014
Length Length_QDR1_D_BWS [InNetClass('Q1_D[35..0]') and InNetClass('Q1_BWS[3..0]')] p2: maxlimit=48.384 minlimit=47.876
Length Length_QDR1_ADR_CRTL [InNetClass('Q1_A[18..0]&CTRL')] p3: maxlimit=48.638 minlimit=47.622
MatchedLengths MatchedLengths_QDR1_clocks_pairs [(InDifferentialPairClass('clocks_QDR1'))] p1: tolerance=0.635 checknetsindiffpair=FALSE checkdiffpairvsdiffpair=TRUE checkothers=FALSE
MatchedLengths MatchedLengths_QDR1_within_cloks_pairs [(InDifferentialPairClass('clocks_QDR1'))] p2: tolerance=0.254 checknetsindiffpair=TRUE checkdiffpairvsdiffpair=FALSE checkothers=FALSE
MatchedLengths MatchedLengths_QDR2_within_cloks_pairs [(InDifferentialPairClass('clocks_QDR2'))] p3: tolerance=0.254 checknetsindiffpair=TRUE checkdiffpairvsdiffpair=FALSE checkothers=FALSE
MatchedLengths MatchedLengths_QDR2_clocks_pairs [(InDifferentialPairClass('clocks_QDR2'))] p4: tolerance=0.635 checknetsindiffpair=FALSE checkdiffpairvsdiffpair=TRUE checkothers=FALSE
MatchedLengths MatchedLengths_QDR2_resto [InDifferentialPairClass('clocks_QDR2')or InNetClass('Q2_A[18..0]') OR InNetClass('Q2_BWS[3..0]') OR InNetClass('Q2_D[35..0]') OR InNetClass('Q2_Q[35..0]')] p5: tolerance=1.27 checknetsindiffpair=FALSE checkdiffpairvsdiffpair=FALSE checkothers=TRUE
ParallelSegment [InNetClass('Q2_A[18..0]') OR InNetClass('Q2_BWS[3..0]') OR InNetClass('Q2_D[35..0]') OR InNetClass('Q2_Q[35..0]') OR InDifferentialPairClass('clocks_QDR2') vs InNetClass('Q2_A[18..0]') OR InNetClass('Q2_BWS[3..0]') OR InNetClass('Q2_D[35..0]') OR InNetClass('Q2_Q[35..0]') OR InDifferentialPairClass('clocks_QDR2')] p1: limit=25.4 gap=0.382
PlaneClearance [All] p1: clearance=0.508
PlaneConnect [All] p1: planeconnectstyle=Direct reliefexpansion=0.508 reliefentries=4 reliefconductorwidth=0.254 reliefairgap=0.254
PolygonConnect [All] p1: connectstyle=Direct reliefconductorwidth=0.254 reliefentries=4 polygonreliefangle="90 Angle"
RoomDefinition U_SCB_PLLs [InComponentClass('U_SCB_PLLs')] p1: confinementstyle=ConfineIn formatcopy=TRUE lockcomponents=FALSE outline -38.1,-76.708 12.7,-76.708 12.7,-51.308 -38.1,-51.308
RoomDefinition U_Peripherals_Control [InComponentClass('U_Peripherals_Control')] p2: confinementstyle=ConfineIn formatcopy=TRUE lockcomponents=FALSE outline -38.1,-76.708 12.7,-76.708 12.7,-51.308 -38.1,-51.308
RoomDefinition U_uTCA_Tongue3 [InComponentClass('U_uTCA_Tongue3')] p3: confinementstyle=ConfineIn formatcopy=TRUE lockcomponents=FALSE outline 182.75,325.441 192.6,325.441 192.6,393.291 182.75,393.291
RoomDefinition U_SMI_Link_7-12 [InComponentClass('U_SMI_Link_7-12')] p4: confinementstyle=ConfineIn formatcopy=TRUE lockcomponents=FALSE outline 182.75,297.141 192.15,297.141 192.15,324.141 182.75,324.141
RoomDefinition U_RS232_and_USB_ports [InComponentClass('U_RS232_and_USB_ports')] p5: confinementstyle=ConfineIn formatcopy=TRUE lockcomponents=FALSE outline 182.75,283.841 310.949,283.841 310.949,295.891 182.75,295.891
RoomDefinition U_QDRII_power [InComponentClass('U_QDRII_power')] p6: confinementstyle=ConfineIn formatcopy=TRUE lockcomponents=FALSE outline 182.75,275.941 900.798,275.941 900.798,282.591 182.75,282.591
RoomDefinition U_QDRII_mem [InComponentClass('U_QDRII_mem')] p7: confinementstyle=ConfineIn formatcopy=TRUE lockcomponents=FALSE outline 182.75,254.341 301.799,254.341 301.799,274.691 182.75,274.691
RoomDefinition U_Power_Supply [InComponentClass('U_Power_Supply')] p8: confinementstyle=ConfineIn formatcopy=TRUE lockcomponents=FALSE outline 182.75,240.941 1356.347,240.941 1356.347,253.091 182.75,253.091
RoomDefinition U_FPGA_System_Monitor [InComponentClass('U_FPGA_System_Monitor')] p9: confinementstyle=ConfineIn formatcopy=TRUE lockcomponents=FALSE outline 182.75,233.041 586.599,233.041 586.599,239.691 182.75,239.691
RoomDefinition U_FPGA_QDRII [InComponentClass('U_FPGA_QDRII')] p10: confinementstyle=ConfineIn formatcopy=TRUE lockcomponents=FALSE outline 182.75,226.091 205.15,226.091 205.15,231.791 182.75,231.791
RoomDefinition U_FPGA_POWER_DGND [InComponentClass('U_FPGA_POWER_DGND')] p11: confinementstyle=ConfineIn formatcopy=TRUE lockcomponents=FALSE outline 182.75,212.641 309.099,212.641 309.099,224.841 182.75,224.841
RoomDefinition U_FPGA_GTX [InComponentClass('U_FPGA_GTX')] p12: confinementstyle=ConfineIn formatcopy=TRUE lockcomponents=FALSE outline 182.75,184.141 465.199,184.141 465.199,196.291 182.75,196.291
RoomDefinition U_FPGA_CPU_EBI1 [InComponentClass('U_FPGA_CPU_EBI1')] p13: confinementstyle=ConfineIn formatcopy=TRUE lockcomponents=FALSE outline 182.75,142.892 255.249,142.892 255.249,182.891 182.75,182.891
RoomDefinition U_FPGA_Configuration [InComponentClass('U_FPGA_Configuration')] p14: confinementstyle=ConfineIn formatcopy=TRUE lockcomponents=FALSE outline 182.75,125.092 382.199,125.092 382.199,141.642 182.75,141.642
RoomDefinition U_FPGA_CLKs [InComponentClass('U_FPGA_CLKs')] p15: confinementstyle=ConfineIn formatcopy=TRUE lockcomponents=FALSE outline 182.75,112.442 590.799,112.442 590.799,123.842 182.75,123.842
RoomDefinition "U_External WatchDogs" [InComponentClass('U_External WatchDogs')] p16: confinementstyle=ConfineIn formatcopy=TRUE lockcomponents=FALSE outline 182.75,96.592 278.499,96.592 278.499,111.192 182.75,111.192
RoomDefinition U_CPU_memory [InComponentClass('U_CPU_memory')] p17: confinementstyle=ConfineIn formatcopy=TRUE lockcomponents=FALSE outline 182.75,70.792 392.299,70.792 392.299,95.342 182.75,95.342
RoomDefinition U_CPU_JTAG_Power_PLL [InComponentClass('U_CPU_JTAG_Power_PLL')] p18: confinementstyle=ConfineIn formatcopy=TRUE lockcomponents=FALSE outline 182.75,62.342 423.449,62.342 423.449,69.592 182.75,69.592
RoomDefinition U_CPU_IO_Ports [InComponentClass('U_CPU_IO_Ports')] p19: confinementstyle=ConfineIn formatcopy=TRUE lockcomponents=FALSE outline 182.75,47.292 239.399,47.292 239.399,61.092 182.75,61.092
RoomDefinition U_CPU_100M_Ethernet [InComponentClass('U_CPU_100M_Ethernet')] p20: confinementstyle=ConfineIn formatcopy=TRUE lockcomponents=FALSE outline 182.75,30.242 503.299,30.242 503.299,46.042 182.75,46.042
RoomDefinition U_Connectors [InComponentClass('U_Connectors')] p21: confinementstyle=ConfineIn formatcopy=TRUE lockcomponents=FALSE outline 182.75,-36.408 315.399,-36.408 315.399,28.892 182.75,28.892
RoutingVias [All] p1: holewidth=0.2 width=0.5 viastyle="Through Hole" minholewidth=0.2 minwidth=0.5 maxholewidth=0.3 maxwidth=0.7
SilkscreenOverComponentPads [All] p1: minsilkscreentomaskgap=0.254
SolderMaskExpansion [All] p1: expansion=0.102
Width Width_Diff [(InDifferentialPairClass('All Differential Pairs'))] p1: maxlimit=0.125 minlimit=0.1 preferedwidth=0.1 toplayer_minwidth=0.125 toplayer_prefwidth=0.125 midlayer1_maxwidth=0.1 midlayer2_maxwidth=0.1 midlayer3_maxwidth=0.1 bottomlayer_minwidth=0.125 bottomlayer_prefwidth=0.125 minimp=50.000000 maximp=50.000000 favimp=50.000000
Width Width_PWRs&GNDs [InNetClass('PWRs&GNDs')] p2: maxlimit=0.32 minlimit=0.32 preferedwidth=0.32 minimp=50.000000 maximp=50.000000 favimp=50.000000
Width [All] p3: maxlimit=0.175 minlimit=0.109 preferedwidth=0.109 toplayer_minwidth=0.175 toplayer_prefwidth=0.175 midlayer1_maxwidth=0.109 midlayer2_maxwidth=0.109 midlayer3_maxwidth=0.109 bottomlayer_minwidth=0.175 bottomlayer_prefwidth=0.175 minimp=50.000000 maximp=50.000000 favimp=50.000000
21 further rules are at their usual default settings.

## Classes and differential pairs
net class PWRs&GNDs: 5VBUSMONITORING +1V0 +1V0_GTX +1V0_GTX_PG +1V2_CPU +1V2_CPU_PG +1V2_GTX +1V2_GTX_PG +1V5 +1V8 +2AV5 +2V5 +2V5_PLL +2V5_PLL_PG +3V0_OSC +3V0_VM53 +3V0_VM53_EN +3V3 +3V3_PG +3V3_PHY +3V3_PLL +3V3_PLL_PG +5VCC_IN AGND GND GND_ETH GND_SHIELD USB_5VBUS VREFDAC VREFQDRII
differential pair class clocks_QDR2: Q2_CQ Q2_K
net class Q2_Q[35..0]: Q2_Q0 Q2_Q1 Q2_Q2 Q2_Q3 Q2_Q4 Q2_Q5 Q2_Q6 Q2_Q7 Q2_Q8 Q2_Q9 Q2_Q10 Q2_Q11 Q2_Q12 Q2_Q13 Q2_Q14 Q2_Q15 Q2_Q16 Q2_Q17 Q2_Q18 Q2_Q19 Q2_Q20 Q2_Q21 Q2_Q22 Q2_Q23 Q2_Q24 Q2_Q25 Q2_Q26 Q2_Q27 Q2_Q28 Q2_Q29 Q2_Q30 Q2_Q31 Q2_Q32 Q2_Q33 Q2_Q34 Q2_Q35
net class Q2_D[35..0]: Q2_D0 Q2_D1 Q2_D2 Q2_D3 Q2_D4 Q2_D5 Q2_D6 Q2_D7 Q2_D8 Q2_D9 Q2_D10 Q2_D11 Q2_D12 Q2_D13 Q2_D14 Q2_D15 Q2_D16 Q2_D17 Q2_D18 Q2_D19 Q2_D20 Q2_D21 Q2_D22 Q2_D23 Q2_D24 Q2_D25 Q2_D26 Q2_D27 Q2_D28 Q2_D29 Q2_D30 Q2_D31 Q2_D32 Q2_D33 Q2_D34 Q2_D35
net class Q2_BWS[3..0]: Q2_BWS0 Q2_BWS1 Q2_BWS2 Q2_BWS3
net class Q2_A[18..0]: Q2_A0 Q2_A1 Q2_A2 Q2_A3 Q2_A4 Q2_A5 Q2_A6 Q2_A7 Q2_A8 Q2_A9 Q2_A10 Q2_A11 Q2_A12 Q2_A13 Q2_A14 Q2_A15 Q2_A16 Q2_A17 Q2_A18
net class Q1_Q[35..0]: Q1_Q0 Q1_Q1 Q1_Q2 Q1_Q3 Q1_Q4 Q1_Q5 Q1_Q6 Q1_Q7 Q1_Q8 Q1_Q9 Q1_Q10 Q1_Q11 Q1_Q12 Q1_Q13 Q1_Q14 Q1_Q15 Q1_Q16 Q1_Q17 Q1_Q18 Q1_Q19 Q1_Q20 Q1_Q21 Q1_Q22 Q1_Q23 Q1_Q24 Q1_Q25 Q1_Q26 Q1_Q27 Q1_Q28 Q1_Q29 Q1_Q30 Q1_Q31 Q1_Q32 Q1_Q33 Q1_Q34 Q1_Q35
net class Q1_D[35..0]: Q1_D0 Q1_D1 Q1_D2 Q1_D3 Q1_D4 Q1_D5 Q1_D6 Q1_D7 Q1_D8 Q1_D9 Q1_D10 Q1_D11 Q1_D12 Q1_D13 Q1_D14 Q1_D15 Q1_D16 Q1_D17 Q1_D18 Q1_D19 Q1_D20 Q1_D21 Q1_D22 Q1_D23 Q1_D24 Q1_D25 Q1_D26 Q1_D27 Q1_D28 Q1_D29 Q1_D30 Q1_D31 Q1_D32 Q1_D33 Q1_D34 Q1_D35
net class Q1_BWS[3..0]: Q1_BWS0 Q1_BWS1 Q1_BWS2 Q1_BWS3
net class Q1_A[18..0]&CTRL: Q1_A0 Q1_A1 Q1_A2 Q1_A3 Q1_A4 Q1_A5 Q1_A6 Q1_A7 Q1_A8 Q1_A9 Q1_A10 Q1_A11 Q1_A12 Q1_A13 Q1_A14 Q1_A15 Q1_A16 Q1_A17 Q1_A18 Q1_DOFF Q1_RPS Q1_WPS
net class PE[0..7]: PE0 PE1 PE2 PE3 PE4 PE5 PE6 PE7
net class PC[0..15]: PC0 PC1 PC2 PC3 PC4 PC5 PC6 PC7 PC8 PC9 PC10 PC11 PC12 PC13 PC14 PC15
net class FPGA_GPIO[0..39]: FPGA_GPIO0 FPGA_GPIO1 FPGA_GPIO2 FPGA_GPIO3 FPGA_GPIO4 FPGA_GPIO5 FPGA_GPIO6 FPGA_GPIO7 FPGA_GPIO8 FPGA_GPIO9 FPGA_GPIO10 FPGA_GPIO11 FPGA_GPIO12 FPGA_GPIO13 FPGA_GPIO14 FPGA_GPIO15 FPGA_GPIO16 FPGA_GPIO17 FPGA_GPIO18 FPGA_GPIO19 FPGA_GPIO20 FPGA_GPIO21 FPGA_GPIO22 FPGA_GPIO23 FPGA_GPIO24 FPGA_GPIO25 FPGA_GPIO26 FPGA_GPIO27 FPGA_GPIO28 FPGA_GPIO29 FPGA_GPIO30 FPGA_GPIO31 FPGA_GPIO32 FPGA_GPIO33 FPGA_GPIO34 FPGA_GPIO35 FPGA_GPIO36 FPGA_GPIO37 FPGA_GPIO38 FPGA_GPIO39
net class EBI0_D[0..31]: EBI0_D0 EBI0_D1 EBI0_D2 EBI0_D3 EBI0_D4 EBI0_D5 EBI0_D6 EBI0_D7 EBI0_D8 EBI0_D9 EBI0_D10 EBI0_D11 EBI0_D12 EBI0_D13 EBI0_D14 EBI0_D15 EBI0_D16 EBI0_D17 EBI0_D18 EBI0_D19 EBI0_D20 EBI0_D21 EBI0_D22 EBI0_D23 EBI0_D24 EBI0_D25 EBI0_D26 EBI0_D27 EBI0_D28 EBI0_D29 EBI0_D30 EBI0_D31
net class EBI0_A[2..15]: EBI0_A2 EBI0_A3 EBI0_A4 EBI0_A5 EBI0_A6 EBI0_A7 EBI0_A8 EBI0_A9 EBI0_A10 EBI0_A11 EBI0_A12 EBI0_A13 EBI0_A14 EBI0_A15
component class U_uTCA_Tongue3: CN4
component class U_SMI_Link_7-12: IC33 J3
component class U_RS232_and_USB_ports: C240 C241 C242 C243 C244 IC31 R171 R172 R173 R174 R175 R176
component class U_QDRII_power: C329 C330 C331 C332 C333 C334 C335 C336 C337 C338 C339 C340 C341 C342 C343 C344 C345 C346 C347 C348 C349 C350 C351 C352 C353 C354 C355 C356 C357 C358 C359 C360 C361 C362 C363 C364 C365 C366 C367 C368 C369 C370 C371 C372 C373 C374 C375 C376 C377 C378 C379 C380 C381 C382 C383 C384 C385 C386 C387 C388 C389 C390 C391 C392 C393 C394 C395 C396 C397 C398 C399 C400 C401 C402 C403 C404 C405 C406 C407 C408 C409 C410 C411 C412 C413 C414 C415 C416 C417 C418 C419 C420 C421 IC45 R212 R213 R214 R215 R216
component class U_QDRII_mem: IC43 RP1 RP2 RP3 RP4 RP5 RP6 RP7 RP8 RP9 RP10 RP11 RP12 RP13 RP14
component class U_Power_Supply: C207 C235 C236 C237 C238 C239 C245 C246 C247 C248 C249 C250 C251 C252 C253 C254 C255 C256 C257 C258 C259 C260 C261 C262 C263 C264 C265 C266 C267 C268 C269 C270 C271 C272 C273 C274 C275 C276 C277 C278 C279 C280 C281 C282 C283 C284 C285 C286 C287 C288 C289 C290 C291 C292 C293 C294 C295 C296 C297 C298 C299 C300 C301 C302 C303 C304 C305 C306 C307 C310 C311 C312 C322 C323 C427 C428 C429 C430 C431 C432 D3 D4 IC32 IC34 IC35 IC37 IC38 IC39 IC44 IC46 IC47 IC48 L11 L13 L14 L15 R178 R180 R181 R185 R186 R188 R189 R190 R191 R195 R196 R198 R204 R205 R206 R207 R209 R210 R211 R227 R228 R229 R230 R231 R232 R233 R234 R235 R236 R237 R238 R239 R240 R241 R242 R243 T2 T3 T4 T5
component class U_FPGA_System_Monitor: C189 C190 C191 C192 C193 C194 C195 C196 C197 C198 C199 C200 IC17 IC18 IC19 IC20 R98 R99 R100 R101 R102 R103 R104 R105 R106 R107 R108 R109 R110 R111 R112 R113 R114 R115 R116 R117 R118 R119 R120 R121 R122 R123 R124 R125 R126 R127 R128 R129 R130 R131 R132 R133 R134 R135 R136 R137 R138 R139
component class U_FPGA_QDRII: R94 R95 R96 R97
component class U_FPGA_POWER_DGND: C69 C70 C71 C72 C73 C74 C75 C76 C77 C78 C79 C80 C81 C82 C83 C84 C85 C86 C87 C88 L4 L5
component class U_SCB_PLLs: C89 C90 C99 C101 C102 C103 C122 C125 C138 C139 C140 C141 C142 C143 C144 C145 C146 C147 C148 C149 C150 C151 C152 C153 C154 C155 C156 C157 C158 C159 C160 C161 C163 C164 C165 C167 C168 C169 C170 C171 C172 C173 C174 C175 C176 C177 C178 C179 C180 C181 C182 C183 C184 C185 C186 C187 C188 C309 IC13 IC14 IC15 IC16 IC49 L6 L7 L8 R60 R61 R62 R63 R64 R65 R66 R67 R68 R69 R70 R71 R72 R73 R74 R75 R76 R77 R78 R79 R80 R81 R82 R83 R84 R85 R86 R87 R88 R89 R90 R91 R92 R93 R219 R220 R221 R222 R223 R224 R225 R226
component class U_FPGA_GTX: C91 C92 C93 C94 C95 C96 C97 C98 C100 C104 C105 C106 C107 C108 C109 C110 C111 C112 C113 C114 C115 C116 C117 C118 C119 C120 C121 C123 C124 C126 C127 C128 C129 C130 C131 C132 C133 C134 C135 C136 C137 R59
component class U_FPGA_CPU_EBI1: IC1 R182 R183
component class U_FPGA_Configuration: C62 C63 C64 C65 C66 D9 D10 IC36 Q1 Q2 R43 R44 R45 R46 R47 R48 R49 R50 R51 R52 R53 R54 R55 R56 R57 R58 R158 R177 R179 R184 S3 TP1 TP2
component class U_FPGA_CLKs: C29 C30 C31 C32 C33 C34 C35 C36 C37 C38 C39 C40 C41 C42 C43 C44 C45 C46 C47 C48 C49 C50 C51 C52 C53 C54 C55 C56 C57 C58 C59 C67 D7 D8 IC4 IC5 IC7 IC8 IC9 IC10 IC11 IC12 IC21 IC22 IC23 IC28 L2 L3 L9 R20 R21 R22 R23 R24 R25 R26 R27 R28 R29 R30 R31 R32 R33 R34 R35 R36 R37 R38 R39 R40 R41 R42 R140 R141 R145 R148 R149 R150 R152 R153 Tr2
component class "U_External WatchDogs": C27 C28 IC2 IC3 R12 R13 R14 R15 R16 R17 R18 R19 S1 S2 X3 X4
component class U_CPU_memory: C219 C220 C221 C222 C223 C224 C225 C226 C227 C228 C229 C230 C231 C232 C233 C234 IC25 IC26 IC27 IC29 R164 R165 R166 R167 R168 R169 R170
component class U_CPU_JTAG_Power_PLL: C1 C2 C3 C4 C5 C6 C7 C8 C9 C10 C11 C12 C13 C14 C15 C16 C17 C18 C19 C20 C21 C22 C23 C24 C25 C26 C60 C61 CN3 D1 D2 D5 D6 IC6 L1 R1 R2 R3 R4 R5 R6 R7 R8 R9 R10 R11 X1 X2
component class U_CPU_IO_Ports: C217 C218 DS1 IC24 R160 R161 R162 R163
component class U_CPU_100M_Ethernet: C68 C162 C166 C201 C202 C203 C204 C205 C206 C208 C209 C210 C211 C212 C213 C214 C215 C216 IC40 IC41 L10 L12 Q3 R142 R143 R144 R146 R147 R151 R154 R155 R156 R157 R159 R187 R192 R193 R194 R197 R199 R200 R201 R202 R203 R208 Tr1
component class U_Connectors: CN1 CN2 CON1 J1 J2 J4 P1 P2 P3 P4 P5 P6 P7 P8
differential pair class clocks_QDR1: Q1_CQ Q1_K
differential pair class clocks_QDR: Q1_CQ Q1_K Q2_CQ Q2_K
component class U_Peripherals_Control: R217 R218
differential pair UTCA_CLK.UTCA_TONGUE2_CLK2: +UTCA_CLK.UTCA_TONGUE2_CLK2_P -UTCA_CLK.UTCA_TONGUE2_CLK2_N
differential pair UTCA_CLK.UTCA_TONGUE2_CLK1: +UTCA_CLK.UTCA_TONGUE2_CLK1_P -UTCA_CLK.UTCA_TONGUE2_CLK1_N
differential pair TXFD12: +TXFD12_P -TXFD12_N
differential pair TXFD11: +TXFD11_P -TXFD11_N
differential pair TXFD10: +TXFD10_P -TXFD10_N
differential pair TXFD9: +TXFD9_P -TXFD9_N
differential pair TXFD8: +TXFD8_P -TXFD8_N
differential pair TXFD7: +TXFD7_P -TXFD7_N
differential pair TXFD6: +TXFD6_P -TXFD6_N
differential pair TXFD5: +TXFD5_P -TXFD5_N
differential pair TXFD4: +TXFD4_P -TXFD4_N
differential pair TXFD3: +TXFD3_P -TXFD3_N
differential pair TXFD2: +TXFD2_P -TXFD2_N
differential pair TXFD1: +TXFD1_P -TXFD1_N
differential pair RXFD12: +RXFD12_P -RXFD12_N
differential pair RXFD11: +RXFD11_P -RXFD11_N
differential pair RXFD10: +RXFD10_P -RXFD10_N
differential pair RXFD9: +RXFD9_P -RXFD9_N
differential pair RXFD8: +RXFD8_P -RXFD8_N
differential pair RXFD7: +RXFD7_P -RXFD7_N
differential pair RXFD6: +RXFD6_P -RXFD6_N
differential pair RXFD5: +RXFD5_P -RXFD5_N
differential pair RXFD4: +RXFD4_P -RXFD4_N
differential pair RXFD3: +RXFD3_P -RXFD3_N
differential pair RXFD2: +RXFD2_P -RXFD2_N
differential pair RXFD1: +RXFD1_P -RXFD1_N
differential pair QDRII_CLK: +QDRII_CLK_P -QDRII_CLK_N
differential pair QDRII_200CLK: +QDRII_200CLK_P -QDRII_200CLK_N
differential pair Q2_K: +Q2_K_P -Q2_K_N
differential pair Q2_CQ: +Q2_CQ_P -Q2_CQ_N
differential pair Q1_K: +Q1_K_P -Q1_K_N
differential pair Q1_CQ: +Q1_CQ_P -Q1_CQ_N
differential pair MGTTX116_3: +MGTTX116_3_P -MGTTX116_3_N
differential pair MGTTX116_2: +MGTTX116_2_P -MGTTX116_2_N
differential pair MGTTX116_1: +MGTTX116_1_P -MGTTX116_1_N
differential pair MGTTX116_0: +MGTTX116_0_P -MGTTX116_0_N
differential pair MGTTX115_3: +MGTTX115_3_P -MGTTX115_3_N
differential pair MGTTX115_2: +MGTTX115_2_P -MGTTX115_2_N
differential pair MGTTX115_1: +MGTTX115_1_P -MGTTX115_1_N
differential pair MGTTX115_0: +MGTTX115_0_P -MGTTX115_0_N
differential pair MGTTX114_3: +MGTTX114_3_P -MGTTX114_3_N
differential pair MGTTX114_2: +MGTTX114_2_P -MGTTX114_2_N
differential pair MGTTX114_1: +MGTTX114_1_P -MGTTX114_1_N
differential pair MGTTX114_0: +MGTTX114_0_P -MGTTX114_0_N
differential pair MGTTX113_3: +MGTTX113_3_P -MGTTX113_3_N
differential pair MGTTX113_2: +MGTTX113_2_P -MGTTX113_2_N
differential pair MGTTX113_1: +MGTTX113_1_P -MGTTX113_1_N
differential pair MGTTX113_0: +MGTTX113_0_P -MGTTX113_0_N
differential pair MGTTX112_3: +MGTTX112_3_P -MGTTX112_3_N
differential pair MGTTX112_2: +MGTTX112_2_P -MGTTX112_2_N
differential pair MGTTX112_1: +MGTTX112_1_P -MGTTX112_1_N
differential pair MGTTX112_0: +MGTTX112_0_P -MGTTX112_0_N
differential pair MGTRX116_3: +MGTRX116_3_P -MGTRX116_3_N
differential pair MGTRX116_2: +MGTRX116_2_P -MGTRX116_2_N
differential pair MGTRX116_1: +MGTRX116_1_P -MGTRX116_1_N
differential pair MGTRX116_0: +MGTRX116_0_P -MGTRX116_0_N
differential pair MGTRX115_3: +MGTRX115_3_P -MGTRX115_3_N
differential pair MGTRX115_2: +MGTRX115_2_P -MGTRX115_2_N
differential pair MGTRX115_1: +MGTRX115_1_P -MGTRX115_1_N
differential pair MGTRX115_0: +MGTRX115_0_P -MGTRX115_0_N
differential pair MGTRX114_3: +MGTRX114_3_P -MGTRX114_3_N
differential pair MGTRX114_2: +MGTRX114_2_P -MGTRX114_2_N
differential pair MGTRX114_1: +MGTRX114_1_P -MGTRX114_1_N
differential pair MGTRX114_0: +MGTRX114_0_P -MGTRX114_0_N
differential pair MGTRX113_3: +MGTRX113_3_P -MGTRX113_3_N
differential pair MGTRX113_2: +MGTRX113_2_P -MGTRX113_2_N
differential pair MGTRX113_1: +MGTRX113_1_P -MGTRX113_1_N
differential pair MGTRX113_0: +MGTRX113_0_P -MGTRX113_0_N
differential pair MGTRX112_3: +MGTRX112_3_P -MGTRX112_3_N
differential pair MGTRX112_2: +MGTRX112_2_P -MGTRX112_2_N
differential pair MGTRX112_1: +MGTRX112_1_P -MGTRX112_1_N
differential pair MGTRX112_0: +MGTRX112_0_P -MGTRX112_0_N
differential pair FREE_SRCC: +FREE_SRCC_P -FREE_SRCC_N
differential pair FREE_MRCC: +FREE_MRCC_P -FREE_MRCC_N
differential pair FREE_GC1: +FREE_GC1_P -FREE_GC1_N
differential pair FPGA_GCLK: +FPGA_GCLK_P -FPGA_GCLK_N
differential pair FPGA_25MHZ_CLK: +FPGA_25MHZ_CLK_P -FPGA_25MHZ_CLK_N
differential pair ETH_100MHZ.TX: +ETH_100MHZ.TX_P -ETH_100MHZ.TX_N
differential pair ETH_100MHZ.RX: +ETH_100MHZ.RX_P -ETH_100MHZ.RX_N
differential pair DMTDCLK_MB: +DMTDCLK_MB_P -DMTDCLK_MB_N
differential pair DMTD_CLK: +DMTD_CLK_P -DMTD_CLK_N
differential pair CLK125MHZ_EXT: +CLK125MHZ_EXT_P -CLK125MHZ_EXT_N
differential pair MGTREFCLK112: +MGTREFCLK112_P -MGTREFCLK112_N
differential pair MGTREFCLK113: +MGTREFCLK113_P -MGTREFCLK113_N
differential pair MGTREFCLK114: +MGTREFCLK114_P -MGTREFCLK114_N
differential pair MGTREFCLK115: +MGTREFCLK115_P -MGTREFCLK115_N
differential pair MGTREFCLK116: +MGTREFCLK116_P -MGTREFCLK116_N

## Components (designator, comment, footprint, x,y, rotation, side; value= is the part's Value field where it differs from the comment)
C1 "22uF" CC2012-0805 115.55,30.35 r0 bottom
C2 "22uF" CC2012-0805 124,38.15 r180 bottom
C3 "22uF" CC2012-0805 122.85,30.95 r180 bottom
C4 "22uF" CC2012-0805 123.05,35.6 r180 bottom
C5 "100nF" CC1005-0402 119.15,32.15 r180 bottom
C6 "100nF" CC1005-0402 13.95,-49.15 r270 bottom
C7 "100nF" CC1005-0402 124.85,27.25 r180 bottom
C8 "100nF" CC1005-0402 116.35,39.15 r0 bottom
C9 "100nF" CC1005-0402 114.9,25.65 r0 bottom
C10 "100nF" CC1005-0402 114.8,27.25 r0 bottom
C11 "100nF" CC1005-0402 123.4,26.35 r180 bottom
C12 "100nF" CC1005-0402 126.9,28.35 r90 bottom
C13 "100nF" CC1005-0402 116.8,33 r90 bottom
C14 "100nF" CC1005-0402 119.1,34.55 r90 bottom
C15 "100nF" CC1005-0402 118.4,29.1 r270 bottom
C16 "100nF" CC1005-0402 115.95,37.15 r0 bottom
C17 "100nF" CC1005-0402 121.55,33.5 r0 bottom
C18 "100nF" CC1005-0402 117.85,35.9 r90 bottom
C19 "15pF" CC1005-0402 118.25,40.35 r180 bottom
C20 "15pF" CC1005-0402 113.55,40.35 r0 bottom
C21 "22pF" CC1005-0402 9.15,-60.55 r270 bottom
C22 "22pF" CC1005-0402 6.75,-60.55 r90 bottom
C23 "1nF" CC1005-0402 12.95,-58.6 r270 bottom
C24 "10nF" CC1005-0402 11.401,-58.708 r90 bottom
C25 "470pF" CC1005-0402 119.408,26.101 r180 bottom
C26 "4.7nF" CC1005-0402 119.4,24.55 r180 bottom
C27 "100nF" CC1005-0402 151.43,30.97 r180 top
C28 "100nF" CC1005-0402 135.05,29.65 r180 bottom
C29 "100nF" CC1005-0402 84.85,-38.1 r90 bottom
C30 "100nF" CC1005-0402 83.15,-36.25 r90 top
C31 "100nF" CC1005-0402 78.85,-34.95 r180 top
C32 "10uF" CC1608-0603 78.72,-36.52 r180 top
C33 "100nF" CC1005-0402 82.74,-39.11 r270 top
C34 "100nF" CC1005-0402 78.75,-35.75 r180 bottom
C35 "10uF" CC1608-0603 81.59,-39.11 r270 top
C36 "10uF" CC1608-0603 71.43,-36.35 r270 bottom
C37 "100nF" CC1005-0402 73.4,-36.11 r90 bottom
C38 "100nF" CC1005-0402 64.15,-39.75 r90 top
C39 "10uF" CC1608-0603 67,-40.25 r0 top
C40 "100nF" CC1005-0402 69.2,-33.45 r90 top
C41 "100nF" CC1005-0402 64.45,-35.65 r180 top
C42 "10uF" CC1608-0603 67.8,-33.45 r90 top
C43 "100nF" CC1005-0402 169.49,19.38 r270 top
C44 "47nF" CC1005-0402 170.35,20.22 r0 bottom
C45 "100nF" CC1005-0402 169.55,22.77 r270 top
C46 "47nF" CC1005-0402 173.08,22.96 r180 bottom
C47 "100nF" CC1005-0402 164.38,16.92 r0 bottom
C48 "10uF" CC1608-0603 168.78,24.65 r180 bottom
C49 "100nF" CC1005-0402 167.26,24.72 r0 top
C50 "100nF" CC1005-0402 164.48,15.3 r180 bottom
C51 "100nF" CC1005-0402 165.46,22.1 r270 bottom
C52 "100nF" CC1005-0402 170.99,-3.62 r180 bottom
C53 "47nF" CC1005-0402 170.88,1.64 r90 bottom
C54 "47nF" CC1005-0402 171.78,-1.38 r90 bottom
C55 "10uF" CC1608-0603 167.86,-3.06 r180 bottom
C56 "100nF" CC1005-0402 165.84,-0.71 r90 bottom
C57 "100nF" CC1005-0402 167.86,-1.05 r180 bottom
C58 "10nF" CC1005-0402 165.73,2.54 r90 top
C59 "100nF" CC1005-0402 168.7,9.39 r180 bottom
C60 "470nF" CC1005-0402 94.95,-25.15 r90 top
C61 "1uF" CC1005-0402 101.5,-25.55 r270 top
C62 "100nF" CC1005-0402 3,-48.75 r0 bottom
C63 "100nF" CC1005-0402 5.85,-39.65 r0 bottom
C64 "10uF" CC1608-0603 9.1,-44.3 r180 bottom
C65 "100nF" CC1005-0402 6.75,-45.55 r90 bottom
C66 "100nF" CC1005-0402 8.25,-41.95 r270 bottom
C67 "o.c." CC1005-0402 105.35,-34.25 r0 top
C68 "4.7uF" CC1608-0603 105.1,-26.8 r180 top
C69 "470nF" CC1005-0402 82,6.65 r270 bottom
C70 "470nF" CC1005-0402 82,3.65 r270 bottom
C71 "4.7uF" CC1608-0603 79,1 r180 bottom
C72 "4.7uF" CC1608-0603 75.4,1 r180 bottom
C73 "470nF" CC1005-0402 31.2,-25.9 r270 bottom
C74 "4.7uF" CC1608-0603 29.55,-26.2 r90 bottom
C75 "22uF" CC2012-0805 27.5,-26.4 r90 bottom
C76 "22uF" CC2012-0805 25.2,-26.4 r90 bottom
C77 "330uF" D 120.85,-71.95 r270 bottom
C78 "330uF" D 121.5,-60.55 r270 bottom
C79 "330uF" D 128,-59.1 r270 bottom
C80 "330uF" D 116.6,-60.6 r270 bottom
C81 "330uF" D 127.25,-71.9 r270 bottom
C82 "330uF" D 115.65,-71.45 r270 bottom
C83 "470nF" CC1005-0402 21.1,-26.5 r270 bottom
C84 "4.7uF" CC1608-0603 82,-4.15 r270 bottom
C85 "22uF" CC2012-0805 33,-30.5 r180 bottom
C86 "22uF" CC2012-0805 82,-7.95 r270 bottom
C87 "470nF" CC1005-0402 33.8,-26.25 r270 bottom
C88 "10nF" CC1005-0402 37.65,-26.15 r270 bottom
C89 "10nF" CC1005-0402 93.4,-54.8 r180 top
C90 "10nF" CC1005-0402 93.45,-53.75 r180 top
C91 "4.7uF" CC1608-0603 96.7,53.75 r180 bottom
C92 "4.7uF" CC1608-0603 83.4,59.6 r270 bottom
C93 "4.7uF" CC1608-0603 73.25,59.1 r270 bottom
C94 "4.7uF" CC1608-0603 72.7,54.75 r90 bottom
C95 "4.7uF" CC1608-0603 86.95,54.85 r90 bottom
C96 "4.7uF" CC1608-0603 80.45,54.15 r90 bottom
C97 "330uF" D 96.35,56.75 r0 bottom
C98 "330uF" D 94.45,60.95 r0 bottom
C99 "10nF" CC1005-0402 93.4,-56.85 r180 top
C100 "100nF" CC1005-0402 69.95,56.7 r90 bottom
C101 "10nF" CC1005-0402 93.35,-55.85 r180 top
C102 "10nF" CC1005-0402 86.9,-60.65 r90 top
C103 "10nF" CC1005-0402 88.3,-60.65 r90 top
C104 "220nF" CC1005-0402 85.2,64.802 r270 top
C105 "220nF" CC1005-0402 76.5,65.2 r90 bottom
C106 "220nF" CC1005-0402 104.95,52.6 r180 top
C107 "220nF" CC1005-0402 105.348,59 r0 bottom
C108 "220nF" CC1005-0402 104.95,60.65 r180 top
C109 "220nF" CC1005-0402 105.348,54.6 r0 bottom
C110 "220nF" CC1005-0402 99.25,64.802 r270 top
C111 "220nF" CC1005-0402 101.85,65.2 r90 bottom
C112 "220nF" CC1005-0402 95.4,64.802 r270 top
C113 "220nF" CC1005-0402 63.25,50 r180 bottom
C114 "220nF" CC1005-0402 91.95,64.802 r270 top
C115 "220nF" CC1005-0402 63.25,60.1 r180 bottom
C116 "220nF" CC1005-0402 88.85,64.802 r270 top
C117 "220nF" CC1005-0402 63.25,55.35 r180 bottom
C118 "220nF" CC1005-0402 81.35,64.802 r270 top
C119 "220nF" CC1005-0402 72.8,65.2 r90 bottom
C120 "220nF" CC1005-0402 77.9,64.802 r270 top
C121 "220nF" CC1005-0402 64.4,65.2 r90 bottom
C122 "10nF" CC1005-0402 84.2,-60.55 r90 top
C123 "220nF" CC1005-0402 74.6,64.802 r270 top
C124 "220nF" CC1005-0402 90.65,65.2 r90 bottom
C125 "10nF" CC1005-0402 85.6,-60.6 r90 top
C126 "220nF" CC1005-0402 71.15,64.802 r270 top
C127 "220nF" CC1005-0402 79.25,65.2 r90 bottom
C128 "220nF" CC1005-0402 66.8,64.802 r270 top
C129 "220nF" CC1005-0402 69.35,65.2 r90 bottom
C130 "220nF" CC1005-0402 104.95,56.75 r180 top
C131 "220nF" CC1005-0402 83.65,65.2 r90 bottom
C132 "220nF" CC1005-0402 63.05,57.55 r0 top
C133 "220nF" CC1005-0402 87.2,65.2 r90 bottom
C134 "220nF" CC1005-0402 63.05,53.05 r0 top
C135 "220nF" CC1005-0402 93.75,65.2 r90 bottom
C136 "220nF" CC1005-0402 63.05,62.35 r0 top
C137 "220nF" CC1005-0402 97.65,65.2 r90 bottom
C138 "10nF" CC1005-0402 79.35,-54.75 r0 top
C139 "10nF" CC1005-0402 79.4,-53.4 r0 top
C140 "10uF" CC1608-0603 58.18,-60.25 r270 bottom
C141 "100nF" CC1005-0402 57.08,-63.55 r0 bottom
C142 "100nF" CC1005-0402 57.25,-57.45 r180 top
C143 "100nF" CC1005-0402 55.73,-58.73 r0 bottom
C144 "10uF" CC1608-0603 53.27,-62.28 r90 bottom
C145 "10uF" CC1608-0603 107.66,-56.4 r90 bottom
C146 "100nF" CC1005-0402 55.11,-65.24 r180 top
C147 "100nF" CC1005-0402 108.85,-55.97 r270 top
C148 "100nF" CC1005-0402 51.85,-61.2 r90 top
C149 "100nF" CC1005-0402 104.27,-58.26 r180 bottom
C150 "100nF" CC1005-0402 107.49,-58.52 r180 bottom
C151 "10uF" CC1608-0603 101.9,-51.74 r90 top
C152 "100nF" CC1005-0402 102.41,-56.06 r90 bottom
C153 "100nF" CC1005-0402 105.46,-53.52 r180 bottom
C154 "10nF" CC1005-0402 54.3,-57.35 r180 top
C155 "10uF" CC1608-0603 58.1,-56.78 r90 bottom
C156 "10uF" CC1608-0603 55.47,-57.2 r180 bottom
C157 "10uF" CC1608-0603 109.27,-56.14 r90 bottom
C158 "10uF" CC1608-0603 110.88,-55.97 r90 top
C159 "100nF" CC1005-0402 171.35,-8.9 r270 bottom
C160 "100nF" CC1005-0402 47.25,-63.84 r0 top
C161 "10uF" CC1608-0603 90.31,-47.85 r180 bottom
C162 "100nF" CC1005-0402 164.35,-9.55 r0 top
C163 "1nF" CC1005-0402 90.31,-47.48 r180 top
C164 "33pF" CC1005-0402 85.98,-48.6 r0 bottom
C165 "100nF" CC1005-0402 85.73,-44.11 r180 top
C166 "10pF" CC1005-0402 164.4,-8.4 r0 top
C167 "10uF" CC1608-0603 87.76,-58.93 r0 bottom
C168 "220nF" CC1005-0402 88.1,-47.67 r270 bottom
C169 "100nF" CC1005-0402 91.1,-55.35 r90 bottom
C170 "68pF" CC1005-0402 87.34,-47.07 r0 top
C171 "100nF" CC1005-0402 87.25,-57.41 r180 bottom
C172 "100nF" CC1005-0402 81.2,-55.6 r90 bottom
C173 "100nF" CC1005-0402 91.15,-52.58 r90 bottom
C174 "100nF" CC1005-0402 89.79,-52.66 r90 bottom
C175 "10uF" CC1608-0603 89.79,-55.46 r270 bottom
C176 "100nF" CC1005-0402 89.96,-57.32 r0 bottom
C177 "100nF" CC1005-0402 85,-58.05 r270 bottom
C178 "100nF" CC1005-0402 82.6,-57.7 r180 bottom
C179 "10nF" CC1005-0402 82.7,-46.69 r270 bottom
C180 "100nF" CC1005-0402 82.6,-52.45 r270 bottom
C181 "100nF" CC1005-0402 82.5,-55.6 r270 bottom
C182 "10nF" CC1005-0402 84.05,-46.69 r270 bottom
C183 "100nF" CC1005-0402 83.69,-46.8 r270 top
C184 "100nF" CC1005-0402 90.98,-59.44 r0 top
C185 "10nF" CC1005-0402 93.52,-49.87 r180 top
C186 "100nF" CC1005-0402 84.86,-46.74 r270 top
C187 "100nF" CC1005-0402 49.61,-65.43 r270 top
C188 "10nF" CC1005-0402 93.35,-51.14 r180 top
C189 "10nF" CC1005-0402 51.1,-55.5 r180 top
C190 "10nF" CC1005-0402 54.309,-51.601 r180 top
C191 "100nF" CC1005-0402 112.15,-51.6 r90 bottom
C192 "100nF" CC1005-0402 135.95,-9.75 r90 bottom
C193 "100nF" CC1005-0402 69.6,42.6 r90 bottom
C194 "100nF" CC1005-0402 76.8,42.4 r90 bottom
C195 "10nF" CC1005-0402 54.241,-49.999 r0 top
C196 "10nF" CC1005-0402 51,-53.85 r0 top
C197 "10nF" CC1005-0402 61.15,-51.95 r0 top
C198 "10nF" CC1005-0402 61.35,-54.25 r180 top
C199 "10nF" CC1005-0402 57.6,-49.75 r0 top
C200 "10nF" CC1005-0402 57.6,-51.45 r180 top
C201 "100nF" CC1005-0402 146.13,-17.6 r0 top
C202 "10pF" CC1005-0402 145.53,-33.03 r90 top
C203 "10uF" CC1608-0603 136.76,-22.77 r0 top
C204 "10pF" CC1005-0402 136.76,-30.67 r180 top
C205 "10pF" CC1005-0402 133.96,-21.97 r0 bottom
C206 "470pF" CC1005-0402 146.65,-15.05 r90 top
C207 "100nF" CC1005-0402 145.08,-15.25 r270 top
C208 "100nF" CC1005-0402 143.06,-33.21 r90 top
C209 "100nF" CC1005-0402 145.81,-19.16 r0 top
C210 "100nF" CC1005-0402 137.8,-20.4 r270 top
C211 "10uF" CC1608-0603 141.21,-19.61 r270 top
C212 "100nF" CC1005-0402 148.02,-32.4 r180 bottom
C213 "100nF" CC1005-0402 148.17,-32.32 r180 top
C214 "100nF" CC1608-0603 135.45,-32.75 r180 top
C215 "100nF" CC1005-0402 151.85,-17 r0 top
C216 "100nF" CC1005-0402 151.92,-18.38 r0 top
C217 "100nF" CC1005-0402 -0.35,-60.45 r270 top
C218 "100nF" CC1005-0402 3.4,-60.7 r270 top
C219 "100nF" CC1005-0402 109.6,-31.35 r270 top
C220 "100nF" CC1005-0402 136.43,4.43 r90 top
C221 "100nF" CC1005-0402 152.63,4.15 r90 top
C222 "100nF" CC1005-0402 132.95,14.7 r270 bottom
C223 "100nF" CC1005-0402 147.17,11.46 r180 bottom
C224 "100nF" CC1005-0402 152.9,9.98 r90 top
C225 "100nF" CC1005-0402 153.27,-2.42 r0 top
C226 "100nF" CC1005-0402 147.72,-5.01 r180 bottom
C227 "100nF" CC1005-0402 135.51,-3.07 r180 top
C228 "100nF" CC1005-0402 135.78,-0.2 r180 top
C229 "100nF" CC1005-0402 135.78,9.8 r180 top
C230 "100nF" CC1005-0402 140.95,13.75 r90 bottom
C231 "100nF" CC1005-0402 147.17,14.05 r180 bottom
C232 "100nF" CC1005-0402 152.63,13.65 r270 top
C233 "100nF" CC1005-0402 141.45,-4.35 r270 bottom
C234 "100nF" CC1005-0402 152.63,-4.55 r90 top
C235 "1uF" CC1005-0402 115.15,42.95 r0 bottom
C236 "1uF" CC1005-0402 115.55,44.8 r90 bottom
C237 "1uF" CC1005-0402 13.05,-43.65 r0 bottom
C238 "4.7uF" CC1608-0603 13.5,-41.4 r270 bottom
C239 "22uF 16V" CC2012-0805 150.35,48.9 r0 bottom
C240 "100nF" CC1005-0402 -7.5,-61.05 r180 top
C241 "100nF" CC1005-0402 -8,-58.8 r270 top
C242 "100nF" CC1005-0402 -4.5,-61.2 r180 top
C243 "100nF" CC1005-0402 -5.35,-59.85 r180 top
C244 "100nF" CC1005-0402 -5.6,-54.45 r180 top
C245 "2.7nF" CC1005-0402 449.2,184.6 r90 bottom
C246 "4.7uF" CC1608-0603 445.95,189.7 r0 bottom
C247 "22uF" CC2012-0805 445.95,189.7 r0 top
C248 "22uF 16V" CC2012-0805 522.45,205.95 r180 top
C249 "220uF 10V" D 519.85,198.15 r0 bottom
C250 "1uF" CC1005-0402 519.85,198.15 r0 top
C251 "1uF" CC1005-0402 522.45,208.5 r0 top
C252 "1uF" CC1005-0402 522.45,208.5 r0 bottom
C253 "100nF" CC1005-0402 522.45,205.95 r0 bottom
C254 "22uF 16V" CC2012-0805 508.6,204 r0 top
C255 "4.7uF" CC1608-0603 442.85,184.1 r90 bottom
C256 "4.7uF" CC1608-0603 442.85,187.2 r270 bottom
C257 "22uF 16V" CC2012-0805 510.1,198.1 r180 top
C258 "220uF 10V" D 508.15,205.75 r180 top
C259 "220uF" D 507.6,201.85 r0 top
C260 "220uF" D 508.15,205.75 r180 bottom
C261 "100nF" CC1005-0402 507.6,201.85 r0 bottom
C262 "2.7nF" CC1005-0402 475.6,184.65 r90 bottom
C263 "22uF" CC2012-0805 472.5,189.9 r0 top
C264 "4.7uF" CC1608-0603 472.5,189.85 r0 bottom
C265 "2.7nF" CC1005-0402 462.6,184.7 r90 bottom
C266 "22uF" CC2012-0805 459.65,190.05 r0 top
C267 "4.7uF" CC1608-0603 459.65,190.1 r0 bottom
C268 "22uF" CC2012-0805 501.45,208.05 r180 top
C269 "22uF" CC2012-0805 499.15,197.85 r0 bottom
C270 "22uF" CC2012-0805 499.15,197.85 r0 top
C271 "22uF" CC2012-0805 501.45,205.5 r0 top
C272 "1uF" CC1005-0402 501.45,205.5 r0 bottom
C273 "4.7uF" CC1608-0603 501.45,208.05 r0 bottom
C274 "4.7uF" CC1608-0603 469.45,184.25 r90 bottom
C275 "4.7uF" CC1608-0603 469.45,187.35 r270 bottom
C276 "4.7uF" CC1608-0603 456.3,184.3 r90 bottom
C277 "4.7uF" CC1608-0603 456.3,187.45 r270 bottom
C278 "22uF 16V" CC2012-0805 487.7,203.7 r0 top
C279 "22uF 16V" CC2012-0805 489.35,197.8 r180 top
C280 "220uF 10V" D 487.7,205.45 r0 top
C281 "1uF" CC1005-0402 486.75,201.55 r0 bottom
C282 "2.7nF" CC1005-0402 487.7,205.45 r180 bottom
C283 "22uF" CC2012-0805 486.75,201.55 r0 top
C284 "2.7nF" CC1005-0402 504,184.65 r90 bottom
C285 "22uF" CC2012-0805 501,189.85 r0 top
C286 "4.7uF" CC1608-0603 501,189.9 r180 bottom
C287 "4.7uF" CC1608-0603 479.9,208.2 r180 bottom
C288 "220uF" D 456.1,197.75 r0 bottom
C289 "220uF" D 483.399,170.642 r90 top
C290 "220uF" D 479.9,208.2 r0 top
C291 "220uF" D 479.9,205.65 r0 top
C292 "22uF" CC2012-0805 479.9,205.65 r0 bottom
C293 "100nF" CC1005-0402 495.35,183.5 r180 bottom
C294 "22uF" CC2012-0805 489.449,173.142 r90 top
C295 "22uF" CC2012-0805 458.1,205.35 r180 top
C296 "22uF" CC2012-0805 504.199,173.142 r90 top
C297 "22uF" CC2012-0805 467.2,203.8 r0 top
C298 "4.7uF" CC1608-0603 498,184.45 r90 bottom
C299 "4.7uF" CC1608-0603 497.95,187.55 r270 bottom
C300 "22uF" CC2012-0805 467.95,197.9 r180 top
C301 "22uF" CC2012-0805 467.2,205.55 r0 top
C302 "22uF" CC2012-0805 511.049,173.142 r90 top
C303 "4.7uF" CC1608-0603 467.2,205.55 r180 bottom
C304 "4.7uF" CC1608-0603 465.5,201.65 r0 bottom
C305 "22uF 16V" CC2012-0805 514.8,187.25 r0 bottom
C306 "22uF 16V" CC2012-0805 506.7,186.65 r270 bottom
C307 "220uF 10V" D 192.8,-31.558 r90 top
C309 "100nF" CC1005-0402 183.75,-34.258 r90 top
C310 "2.7nF" CC1005-0402 488.2,184.35 r90 bottom
C311 "22uF" CC2012-0805 485.15,189.6 r0 top
C312 "4.7uF" CC1608-0603 485.15,189.55 r0 bottom
C322 "4.7uF" CC1608-0603 482.15,183.85 r90 bottom
C323 "4.7uF" CC1608-0603 482.15,186.95 r270 bottom
C329 "1uF" CC1005-0402 45.95,-18.95 r90 bottom
C330 "1uF" CC1005-0402 42.95,-18.95 r90 bottom
C331 "1uF" CC1005-0402 48.95,-18.95 r90 bottom
C332 "1uF" CC1005-0402 44.45,-18.95 r90 bottom
C333 "22nF" CC1005-0402 28.8,11.6 r0 bottom
C334 "22nF" CC1005-0402 22.65,10.55 r180 bottom
C335 "22nF" CC1005-0402 29.75,10.4 r0 bottom
C336 "22nF" CC1005-0402 47.45,-18.95 r90 bottom
C337 "100nF" CC1005-0402 19.8,-0.2 r0 bottom
C338 "100nF" CC1005-0402 19.8,-6.15 r0 bottom
C339 "100nF" CC1005-0402 6.7,-4.6 r180 bottom
C340 "100nF" CC1005-0402 6.7,-6.05 r180 bottom
C341 "100nF" CC1005-0402 19.8,-1.7 r0 bottom
C342 "100nF" CC1005-0402 6.7,-3.1 r180 bottom
C343 "100nF" CC1005-0402 6.7,-0.1 r180 bottom
C344 "100nF" CC1005-0402 6.7,-1.6 r180 bottom
C345 "100nF" CC1005-0402 19.8,-4.7 r0 bottom
C346 "100nF" CC1005-0402 23,11.35 r0 bottom
C347 "100nF" CC1005-0402 6.7,1.4 r180 bottom
C348 "100nF" CC1005-0402 19.8,-3.2 r0 bottom
C349 "1nF" CC1005-0402 12.75,0.4 r270 bottom
C350 "1nF" CC1005-0402 15.8,-1.7 r180 bottom
C351 "1nF" CC1005-0402 12.75,-4.7 r90 bottom
C352 "1nF" CC1005-0402 9.7,-1.55 r0 bottom
C353 "1uF" CC1005-0402 137.451,61.289 r0 bottom
C354 "1uF" CC1005-0402 137.38,63.23 r0 bottom
C355 "1uF" CC1005-0402 137.38,65.31 r0 bottom
C356 "1uF" CC1005-0402 139.77,63.18 r270 bottom
C357 "22nF" CC1005-0402 141.85,57.09 r90 bottom
C358 "22nF" CC1005-0402 139.47,57.53 r90 bottom
C359 "22nF" CC1005-0402 137.241,57.241 r90 bottom
C360 "22nF" CC1005-0402 137.38,59.65 r0 bottom
C361 "100nF" CC1005-0402 148.72,59.86 r90 bottom
C362 "100nF" CC1005-0402 150.17,67.43 r90 bottom
C363 "100nF" CC1005-0402 147.93,65.57 r0 bottom
C364 "100nF" CC1005-0402 148.52,64.32 r0 bottom
C365 "100nF" CC1005-0402 150.86,64.67 r90 bottom
C366 "100nF" CC1005-0402 150.02,60.01 r270 bottom
C367 "100nF" CC1005-0402 151.24,60.09 r270 bottom
C368 "100nF" CC1005-0402 147.041,67.931 r90 bottom
C369 "100nF" CC1005-0402 145.03,67.91 r90 bottom
C370 "100nF" CC1005-0402 143.54,67.76 r90 bottom
C371 "100nF" CC1005-0402 141.9,67.91 r90 bottom
C372 "100nF" CC1005-0402 139.36,67.76 r90 bottom
C373 "1nF" CC1005-0402 150.8,56.94 r90 bottom
C374 "1nF" CC1005-0402 148.71,56.94 r90 bottom
C375 "1nF" CC1005-0402 146.47,56.94 r90 bottom
C376 "1nF" CC1005-0402 143.79,57.09 r90 bottom
C377 "100nF" CC1005-0402 37.15,13.25 r270 bottom
C378 "100nF" CC1005-0402 49.85,-29.6 r270 top
C379 "100nF" CC1005-0402 46.5,-30.25 r90 top
C380 "100nF" CC1005-0402 42.7,13.2 r270 bottom
C381 "100nF" CC1005-0402 26.45,7.05 r0 bottom
C382 "100nF" CC1005-0402 56.1,-28.1 r270 top
C383 "100nF" CC1005-0402 54.75,-16.75 r0 bottom
C384 "100nF" CC1005-0402 37.45,-15.85 r90 bottom
C385 "100nF" CC1005-0402 154.61,65.59 r180 bottom
C386 "100nF" CC1005-0402 154.99,62.53 r180 bottom
C387 "100nF" CC1005-0402 154.92,58.25 r180 bottom
C388 "100nF" CC1005-0402 155.99,53.35 r90 bottom
C389 "100nF" CC1005-0402 143.37,71.48 r270 bottom
C390 "100nF" CC1005-0402 139.09,71.48 r270 bottom
C391 "100nF" CC1005-0402 150.6,53.35 r90 top
C392 "100nF" CC1005-0402 152.7,70.95 r270 top
C393 "10uF" CC1608-0603 -13.69,53.79 r180 bottom
C394 "10uF" CC1608-0603 5.7,67.45 r180 top
C395 "1nF" CC1005-0402 132.91,71.33 r90 top
C396 "100nF" CC1005-0402 128.38,70.47 r90 bottom
C397 "100nF" CC1005-0402 128.38,70.42 r90 top
C398 "1uF" CC1005-0402 58.05,-9.7 r180 bottom
C399 "1uF" CC1005-0402 53.85,-29.75 r90 top
C400 "1uF" CC1005-0402 7.85,75.5 r90 bottom
C401 "22nF" CC1005-0402 183.75,-34.658 r90 top
C402 "22nF" CC1005-0402 36.05,-15.85 r270 bottom
C403 "22nF" CC1005-0402 -11.35,78.25 r90 bottom
C404 "22nF" CC1005-0402 -15.5,78 r90 bottom
C405 "1uF" CC1005-0402 -8.75,78.3 r90 bottom
C406 "100nF" CC1005-0402 58.6,-29.2 r270 top
C407 "100nF" CC1005-0402 26.45,-6.2 r0 top
C408 "100nF" CC1005-0402 58.25,-18.75 r0 bottom
C409 "100nF" CC1005-0402 43.3,-13.1 r270 top
C410 "100nF" CC1005-0402 -14.85,59.6 r90 bottom
C411 "100nF" CC1005-0402 -10.3,59.45 r90 bottom
C412 "100nF" CC1005-0402 -2.55,46.15 r90 bottom
C413 "100nF" CC1005-0402 0.95,49.55 r90 bottom
C414 "10uF" CC1608-0603 130.53,71.38 r0 bottom
C415 "10uF" CC1608-0603 130.51,72.83 r0 bottom
C416 "10uF" CC1608-0603 130.55,69.98 r0 bottom
C417 "4.7uF" CC1608-0603 130.5,68.65 r180 bottom
C418 "22nF" CC1005-0402 145.85,59.6 r180 bottom
C419 "22nF" CC1005-0402 145.6,65.35 r90 bottom
C420 "22nF" CC1005-0402 -6.35,70.4 r90 bottom
C421 "22nF" CC1005-0402 -6.5,66.8 r270 bottom
C427 "220uF" D 205,36.642 r90 top
C428 "220uF" D 212.349,36.642 r90 top
C429 "22uF" CC2012-0805 218.449,39.142 r90 top
C430 "22uF" CC2012-0805 225.799,39.142 r90 top
C431 "22uF" CC2012-0805 233.149,39.142 r90 top
C432 "22uF" CC2012-0805 240.049,39.142 r90 top
CN1 "Tyco  1888250-1" TYCO_ETHERNET_1888250-1 165.27,-21.41 r90 top
CN2 "KX15-20K4DE" JAE_KX15_20P -19.2,4.5 r90 bottom
CN3 "BM02B" SH_CRIMP_1MM_2 131.6,-20.25 r90 top
CN4 "UTCA_MCH_TONGUE3" UTCA_MCH_TONGUE2_3_4 0,0 r0 top
CON1 "USB-B" USBB-G 128.1,192.35 r0 top
D1 "TS4148 RZ" CC1608-0603 130.25,-19.95 r270 bottom
D2 "TS4148 RZ" CC1608-0603 131.75,-19.8 r270 bottom
D3 "TS4148 RZ" CC1608-0603 127.2,-20 r270 bottom
D4 "TS4148 RZ" CC1608-0603 128.75,-19.7 r90 bottom
D5 "BAT54A-G" SOT23 150.4,27.65 r180 top
D6 "BAT54A-G" SOT23 13.3,-54.95 r0 bottom
D7 "BAV99" SOT-23#1 167.76,19.38 r180 bottom
D8 "BAV99" SOT-23#1 170.43,-3.17 r0 top
D9 "BAT54A-G" SOT23 1.3,-46.85 r90 bottom
D10 "BAT54A-G" SOT23 1,-42.55 r90 bottom
DS1 "568-0102-222F" "3 mm LED Quad-Level" 176.3,29.15 r90 top
IC1 "AT91SAM9263-CU" TFBGA324 124.6,37.75 r270 top
IC2 "DS1374U-33+" UMAX10 154.05,33.34 r180 bottom
IC3 "DS1374U-18+" UMAX10 136.1,33.31 r180 bottom
IC4 "VM53S3-25.000-2.5/-30+75" VCTCXO_VM53S 82.45,-40.85 r180 bottom
IC5 "AD5662B" SOT23-8 78.72,-39.19 r270 top
IC6 "MIC5232-1.2YD5" SOT23-5AL 73.26,-36.45 r270 top
IC7 "CFPV-45-20 MHz" vs-705 68.3,-40.85 r180 bottom
IC8 "AD5662B" SOT23-8 67.6,-37.15 r0 top
IC9 "MC100EP16" TSOP65P490-8AN 165.57,22.15 r180 top
IC10 "AD8541AKSZ" SOT65P210X110-5N 165.73,16.24 r270 top
IC11 "ADCMP600BRJZ-R2" SOT23-5AL 167.86,-1.16 r90 top
IC12 "SN74ALVC125PW" PW014 128.2,19.8 r270 top
IC13 "CDCM61002RHBT" QFN32_POWERPAD 52.72,-64.21 r90 top
IC14 "CDCM61002RHBT" QFN32_POWERPAD 101.99,-52.84 r0 top
IC15 "MC100EPT21DTG" TSOP65P490-8AN 169.03,-8.99 r0 top
IC16 "AD9516-4BCPZ" QFN50P900X900X100-64M 86.19,-53.56 r270 top
IC17 "TMP100" SOT23A-6L 112.2,-51.45 r0 top
IC18 "TMP100" SOT23A-6L 69.55,42.7 r0 top
IC19 "TMP100" SOT23A-6L 135.8,-9.65 r0 top
IC20 "TMP100" SOT23A-6L 76.8,42.4 r0 top
IC21 "DS90LV011ATMF" MF05A_N 87.7,-38.65 r270 bottom
IC22 "FNETHE025" SPXO 85.3,-35 r0 top
IC23 "IVT3200C" OSC_RAKON_IVT3200C 110.4,-21.5 r0 top
IC24 "TXB0108PWR" TSSOP20 -1.5,-62.442 r0 bottom
IC25 "AT45DB642D-CNU" 8CN3 115.8,-31.2 r180 top
IC26 "SN74AHC1G32" SOT23-5AL 134.23,14.43 r180 top
IC27 "MT29F4G08ABADAWP" TSOP48_12x20 154.38,9.89 r180 bottom
IC28 "LM385M3-2.5" MF03A_N 184.9,25.792 r0 top
IC29 "IS42S32160B-75EBLI" BGA90C80P9X15_1300X1100X120 144.65,3.35 r0 top
IC31 "MAX3232CDBR" SSOP16 -4.7,-61.1 r90 bottom
IC32 "AP7173-SPG-13" SOIC127P600-8AL 445.95,185.8 r0 top
IC33 "XC6VLX130T-1FF1156C" FF1156 82,1 r270 top
IC34 "AP7173-SPG-13" SOIC127P600-8AL 472.45,185.95 r0 top
IC35 "AP7173-SPG-13" SOIC127P600-8AL 459.45,186 r0 top
IC36 "PC28F256P30BFA" BGA64C100P8X8_1300X1000X120 490.55,225.15 r270 top
IC37 "AP7173-SPG-13" SOIC127P600-8AL 500.9,185.95 r0 top
IC38 "MCP1802T-3002I/OT" SOT-23-OT5_N 193.75,39.192 r0 top
IC39 "AP7173-SPG-13" SOIC127P600-8AL 485.05,185.65 r0 top
IC40 "FNETHE025" SPXO 511.35,186.25 r270 top
IC41 "LAN8720A-CP" QFN50P400X400-24W4M 451.1,204.45 r270 top
IC42 "CY7C1314CV18-250BZC" BGA165C100P11X15_1300X1500X140 123.75,-3.4 r180 top
IC43 "CY7C1314CV18-250BZC" BGA165C100P11X15_1300X1500X140 39.4,-3.75 r180 top
IC44 "MCP1802T-3002I/OT" SOT-23-OT5_N 199.15,39.192 r0 top
IC45 "TPS51200DRCR" SON50P300X300X100-11N-R175X250 130.5,70.55 r270 top
IC46 "TPS53126RGET" QFN50P400X400X100-25N-S255 257.849,38.542 r0 top
IC47 "TPS53126RGET" QFN50P400X400X100-25N-S255 336.749,38.542 r0 top
IC48 "AP7173-SPG-13" SOIC127P600-8AL 344.399,38.242 r0 top
IC49 "DS10BR150TSD" SDA08A 192.9,-34.508 r0 top
J1 "QSS-048-01-L-D-DP" QSS-048-01-X-D-DP-A 82,30.4 r0 bottom
J2 "QSS-048-01-L-D-DP" QSS-048-01-X-D-DP-A 94.55,-30.55 r0 bottom
J3 "QSS-016-01-L-D-DP" QSS-016-01-X-D-DP-A -19,-26 r90 top
J4 "DC10A" dc-10 222.8,-33.3 r90 top
L1 "220R@100MHz Ferrite Bead" 0603 115.65,24.15 r180 bottom
L2 "220R@100MHz Ferrite Bead" 0603 81.45,-36.75 r90 top
L3 "220R@100MHz Ferrite Bead" 0603 66.3,-34.25 r90 top
L4 "220R@100MHz Ferrite Bead" 0603 35.65,-26.9 r90 bottom
L5 "220R@100MHz Ferrite Bead" 0603 85,1 r0 bottom
L6 "220R@100MHz Ferrite Bead" 0603 56.8,-56 r0 top
L7 "220R@100MHz Ferrite Bead" 0603 108.85,-58.43 r0 top
L8 "220R@100MHz Ferrite Bead" 0603 89.47,-49.53 r0 bottom
L9 "220R@100MHz Ferrite Bead" 0603 515.1,204.65 r0 bottom
L10 "220R@100MHz Ferrite Bead" 0603 494.2,204.35 r0 bottom
L11 "IHLP2525CZER1R0M01" IHLP2525 451.05,204.4 r0 bottom
L12 "220R@100MHz Ferrite Bead" 0603 516.55,196.85 r180 top
L13 "IHLP2525CZER1R0M01" IHLP2525 518.05,186 r270 top
L14 "IHLP2525CZER1R0M01" IHLP2525 273.249,37.942 r0 top
L15 "IHLP2525CZER1R0M01" IHLP2525 298.299,37.942 r0 top
P1 "SMC" SMB_V-RJ45 176.4,-9.35 r0 top
P2 "MHDR2X3" MHDR2X3 159.3,51.85 r270 top
P3 "SMC" SMB_V-RJ45 176.4,15.05 r0 top
P4 "SMC" SMB_V-RJ45 176.4,23.02 r0 top
P5 "Header 7X2" CONN_HDR_SMD_2mm_2x7 143.7,-46.8 r180 top
P6 "Header 10X2" HDR2X10 128.1,-36.9 r180 top
P7 "SMC" SMB_V-RJ45 176.4,-1.27 r0 top
P8 "SMC" SMB_V-RJ45 176.4,6.93 r0 top
Q1 "NDS331N" SOT23-3 94.7,-38.9 r180 bottom
Q2 "FET-3PIN" SOT-23#2 97.5,-35.95 r0 bottom
Q3 "NDS331N" SOT23-3 185.1,-34.508 r0 top
R1 "Jumper" 0402 9.15,-62.65 r180 bottom
R2 "o.c." 0402 115.5,35 r180 bottom
R3 "o.c." 0402 114.15,28.5 r0 bottom
R4 "Jumper" 0402 7.7,-58.6 r0 bottom
R5 "1K5" 0402 12.8,-60.85 r180 bottom
R6 "2K" 0402 117.25,24.55 r90 bottom
R7 "100K" 0402 114.25,23.85 r270 top
R8 "100K" 0402 116.1,23.8 r270 top
R9 "100K" 0402 117.05,27.55 r90 bottom
R10 "100K" 0402 112.5,23.95 r270 top
R11 "10k" 0402 11.65,-60.2 r270 top
R12 "4K7" 0402 148.21,32.24 r90 top
R13 "4K7" 0402 150.49,32.24 r90 top
R14 "4K7" 0402 149.14,32.24 r90 top
R15 "4K7" 0402 149.22,30.21 r180 top
R16 "4K7" 0402 132.65,32.19 r90 top
R17 "4K7" 0402 162.55,72.4 r270 top
R18 "4K7" 0402 131.34,29.49 r180 top
R19 "4K7" 0402 131.25,32.1 r270 top
R20 "470R" 0402 79.65,-33.25 r180 top
R21 "Jumper" 0402 75.12,-36.11 r270 bottom
R22 "470R" 0402 64.95,-37.15 r180 top
R23 "200R" 0402 162.82,23.7 r270 bottom
R24 "200R" 0402 163.93,23.77 r270 bottom
R25 "100R" 0402 170.89,21.75 r90 bottom
R26 "100R" 0402 169.66,21.75 r90 bottom
R27 "470R" 0402 171.07,22.84 r270 top
R28 "100K" 0402 163.86,20.02 r90 bottom
R29 "10k" 0402 167.83,21.94 r90 bottom
R30 "10k" 0402 166.73,21.94 r90 bottom
R31 "100R" 0402 170.43,0.75 r270 top
R32 "100R" 0402 171.55,0.86 r270 top
R33 "470R" 0402 170.55,-0.6 r270 bottom
R34 "33R" 0603 167.02,-3.54 r180 top
R35 "10k" 0402 167.64,0.63 r90 bottom
R36 "2K2" 0402 165.28,-1.49 r90 top
R37 "10k" 0402 169.09,0.86 r90 bottom
R38 "2K2" 0402 168.31,1.64 r180 top
R39 "100R" 0402 167.58,5.92 r90 bottom
R40 "49R9" 0603 168.92,6.03 r90 bottom
R41 "33R" 0603 171.01,11.92 r90 bottom
R42 "470R" 0402 171.05,6.93 r0 bottom
R43 "100R" 0402 144.45,45.45 r180 bottom
R44 "100R" 0402 106.05,45.75 r0 bottom
R45 "4K7" 0402 96.25,-38.6 r90 bottom
R46 "330R" 0402 97.45,-40.1 r0 bottom
R47 "4K7" 0402 100.65,-40.2 r0 bottom
R48 "4K7" 0402 100.65,-38.9 r0 bottom
R49 "4K7" 0402 100.65,-37.8 r0 bottom
R50 "4K7" 0402 5.35,-46.9 r90 bottom
R51 "o.c." 0402 118.7,22.65 r90 top
R52 "o.c." 0402 119.75,22.65 r90 top
R53 "o.c." 0402 121,22.65 r90 top
R54 "4K7" 0402 8.35,-47.55 r180 bottom
R55 "4K7" 0402 3.5,-43.65 r90 bottom
R56 "4K7" 0402 9.8,-45.9 r270 bottom
R57 "4K7" 0402 3.6,-40.95 r90 bottom
R58 "4K7" 0402 6.75,-42.7 r90 bottom
R59 "100R" 0402 68.4,57.3 r270 bottom
R60 "o.c." 0402 59.62,-62.03 r0 top
R61 "Jumper" 0402 61.06,-60.17 r180 top
R62 "o.c." 0402 59.79,-61.18 r0 bottom
R63 "o.c." 0402 104.53,-59.7 r0 top
R64 "o.c." 0402 60.05,-62.2 r0 bottom
R65 "Jumper" 0402 108.6,-59.7 r180 top
R66 "o.c." 0402 53.1,-59.4 r180 bottom
R67 "o.c." 0402 51.9,-60.65 r270 bottom
R68 "o.c." 0402 104.61,-59.7 r180 bottom
R69 "Jumper" 0402 103.17,-59.62 r0 top
R70 "o.c." 0402 99.53,-55.97 r0 top
R71 "Jumper" 0402 109.27,-52.75 r180 top
R72 "Jumper" 0402 104.78,-51.82 r0 bottom
R73 "o.c." 0402 99.62,-57.16 r0 top
R74 "Jumper" 0402 83.9,-60.3 r270 bottom
R75 "Jumper" 0402 82.8,-60.25 r270 bottom
R76 "200R" 0402 163.8,-8.45 r0 bottom
R77 "33R" 0603 168.95,-8.37 r270 bottom
R78 "200R" 0402 163.8,-9.55 r0 bottom
R79 "820R" 0402 86.66,-47.07 r90 bottom
R80 "390R" 0402 86.91,-49.78 r0 bottom
R81 "200R" 0402 80.15,-53.4 r90 bottom
R82 "200R" 0402 80.1,-54.45 r270 bottom
R83 "4K12" 0402 93.9,-52.6 r180 bottom
R84 "200R" 0402 86,-60.4 r270 bottom
R85 "200R" 0402 84.95,-60.4 r270 bottom
R86 "5K1" 0402 93.69,-50.88 r180 bottom